# Altium PCB StrainNode.PcbDoc (part 1 of 2)
Units mm, origin at the board's own origin, x right, y up, seen from the top; angles counter-clockwise.
Board outline 65 x 65 mm, 4 copper layers (Top Layer 1, GND, 3V3, Bottom Layer 1), stack 0.408 mm thick; 79 components, 56 nets, 295 pads, 250 vias.
Unrouted connection lines stored in the file: 29.
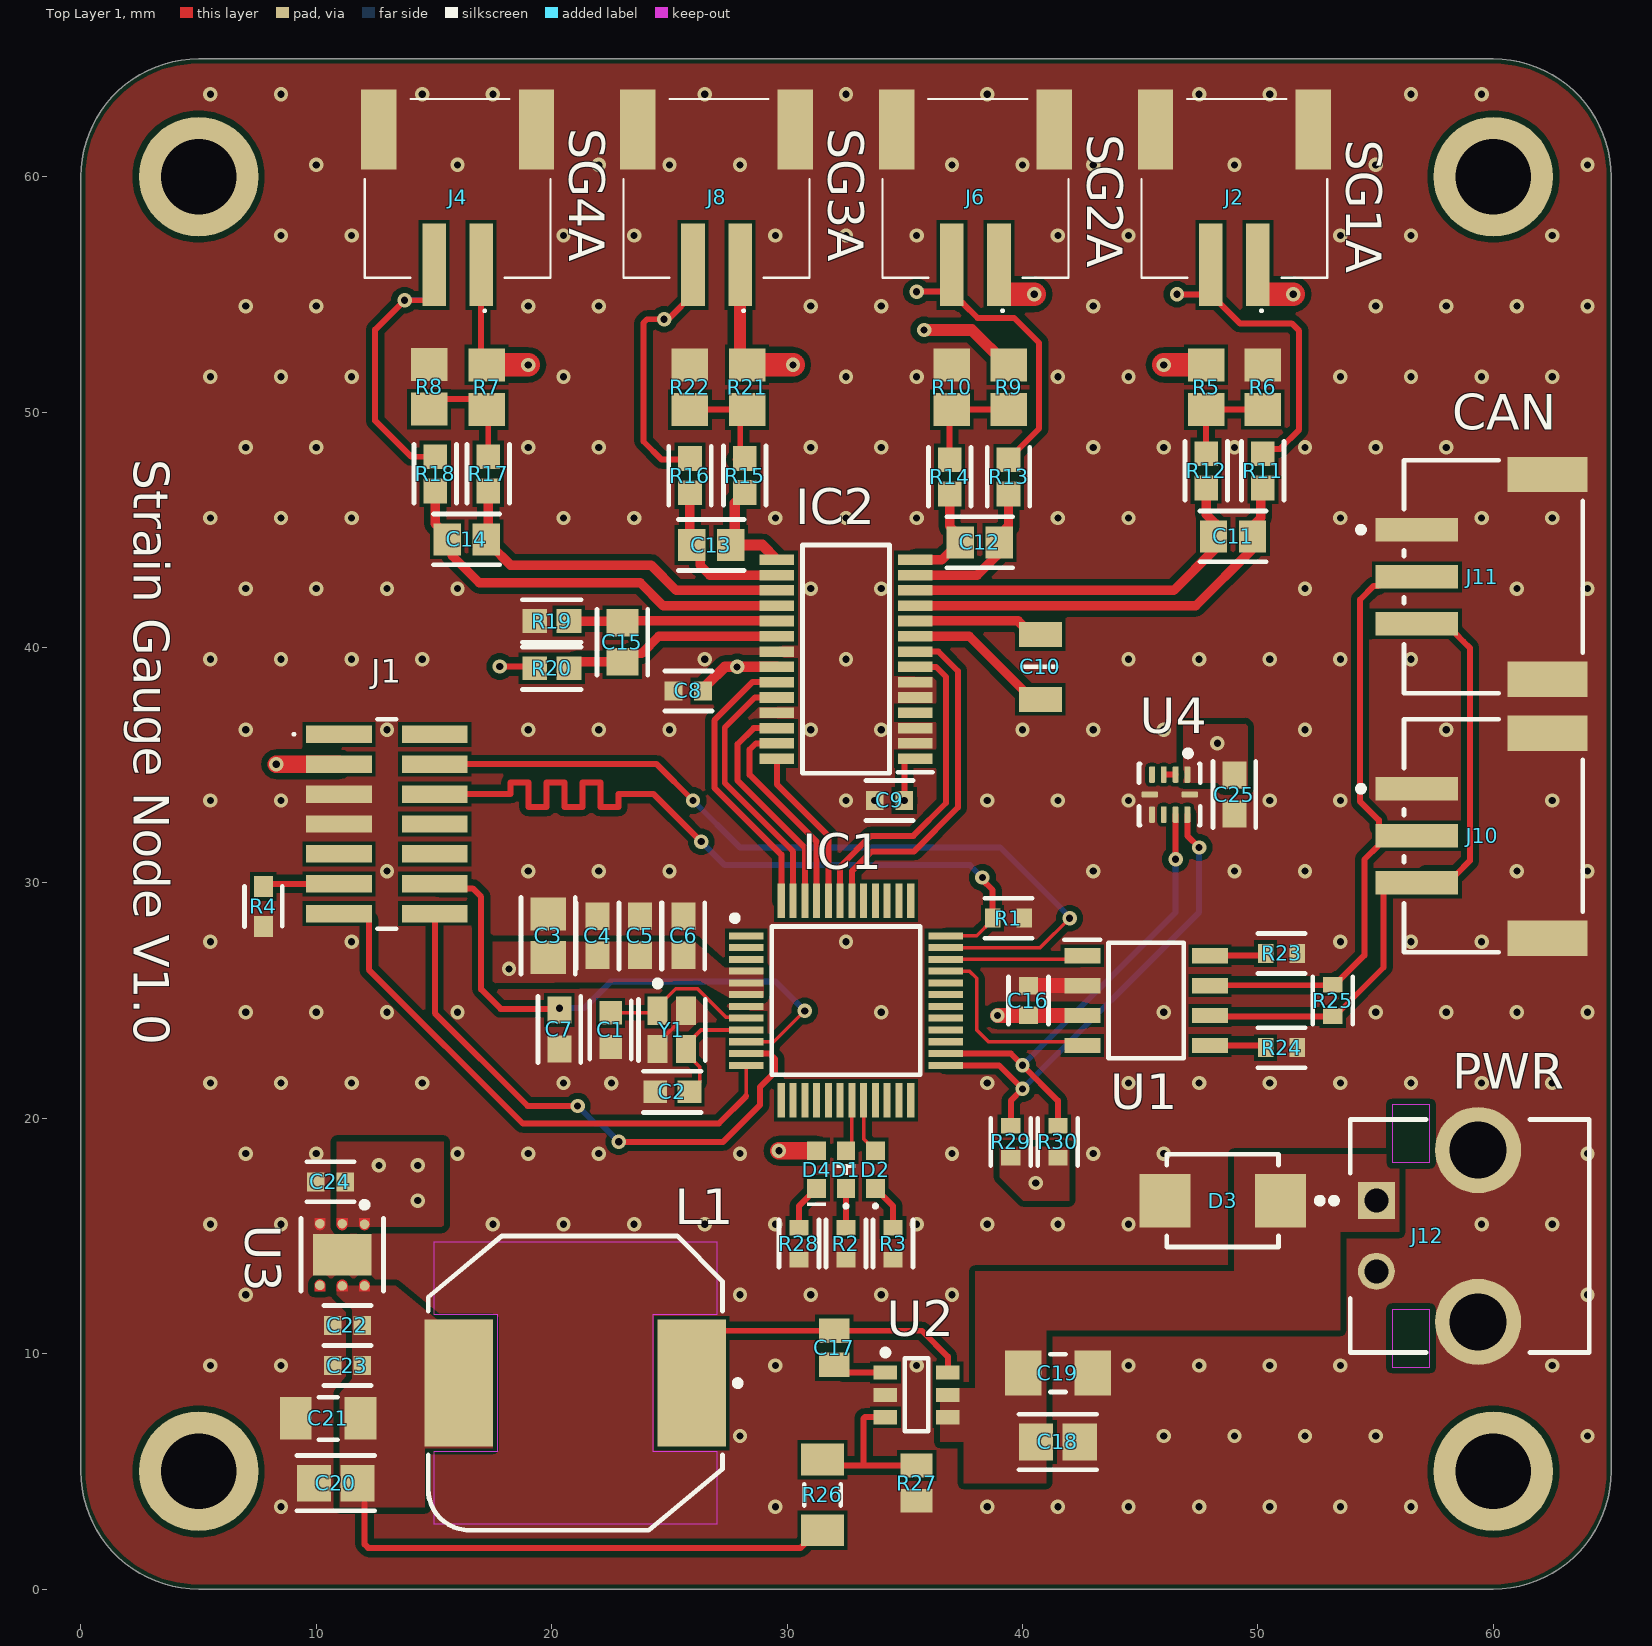
[diagram p0: Top Layer 1 view]
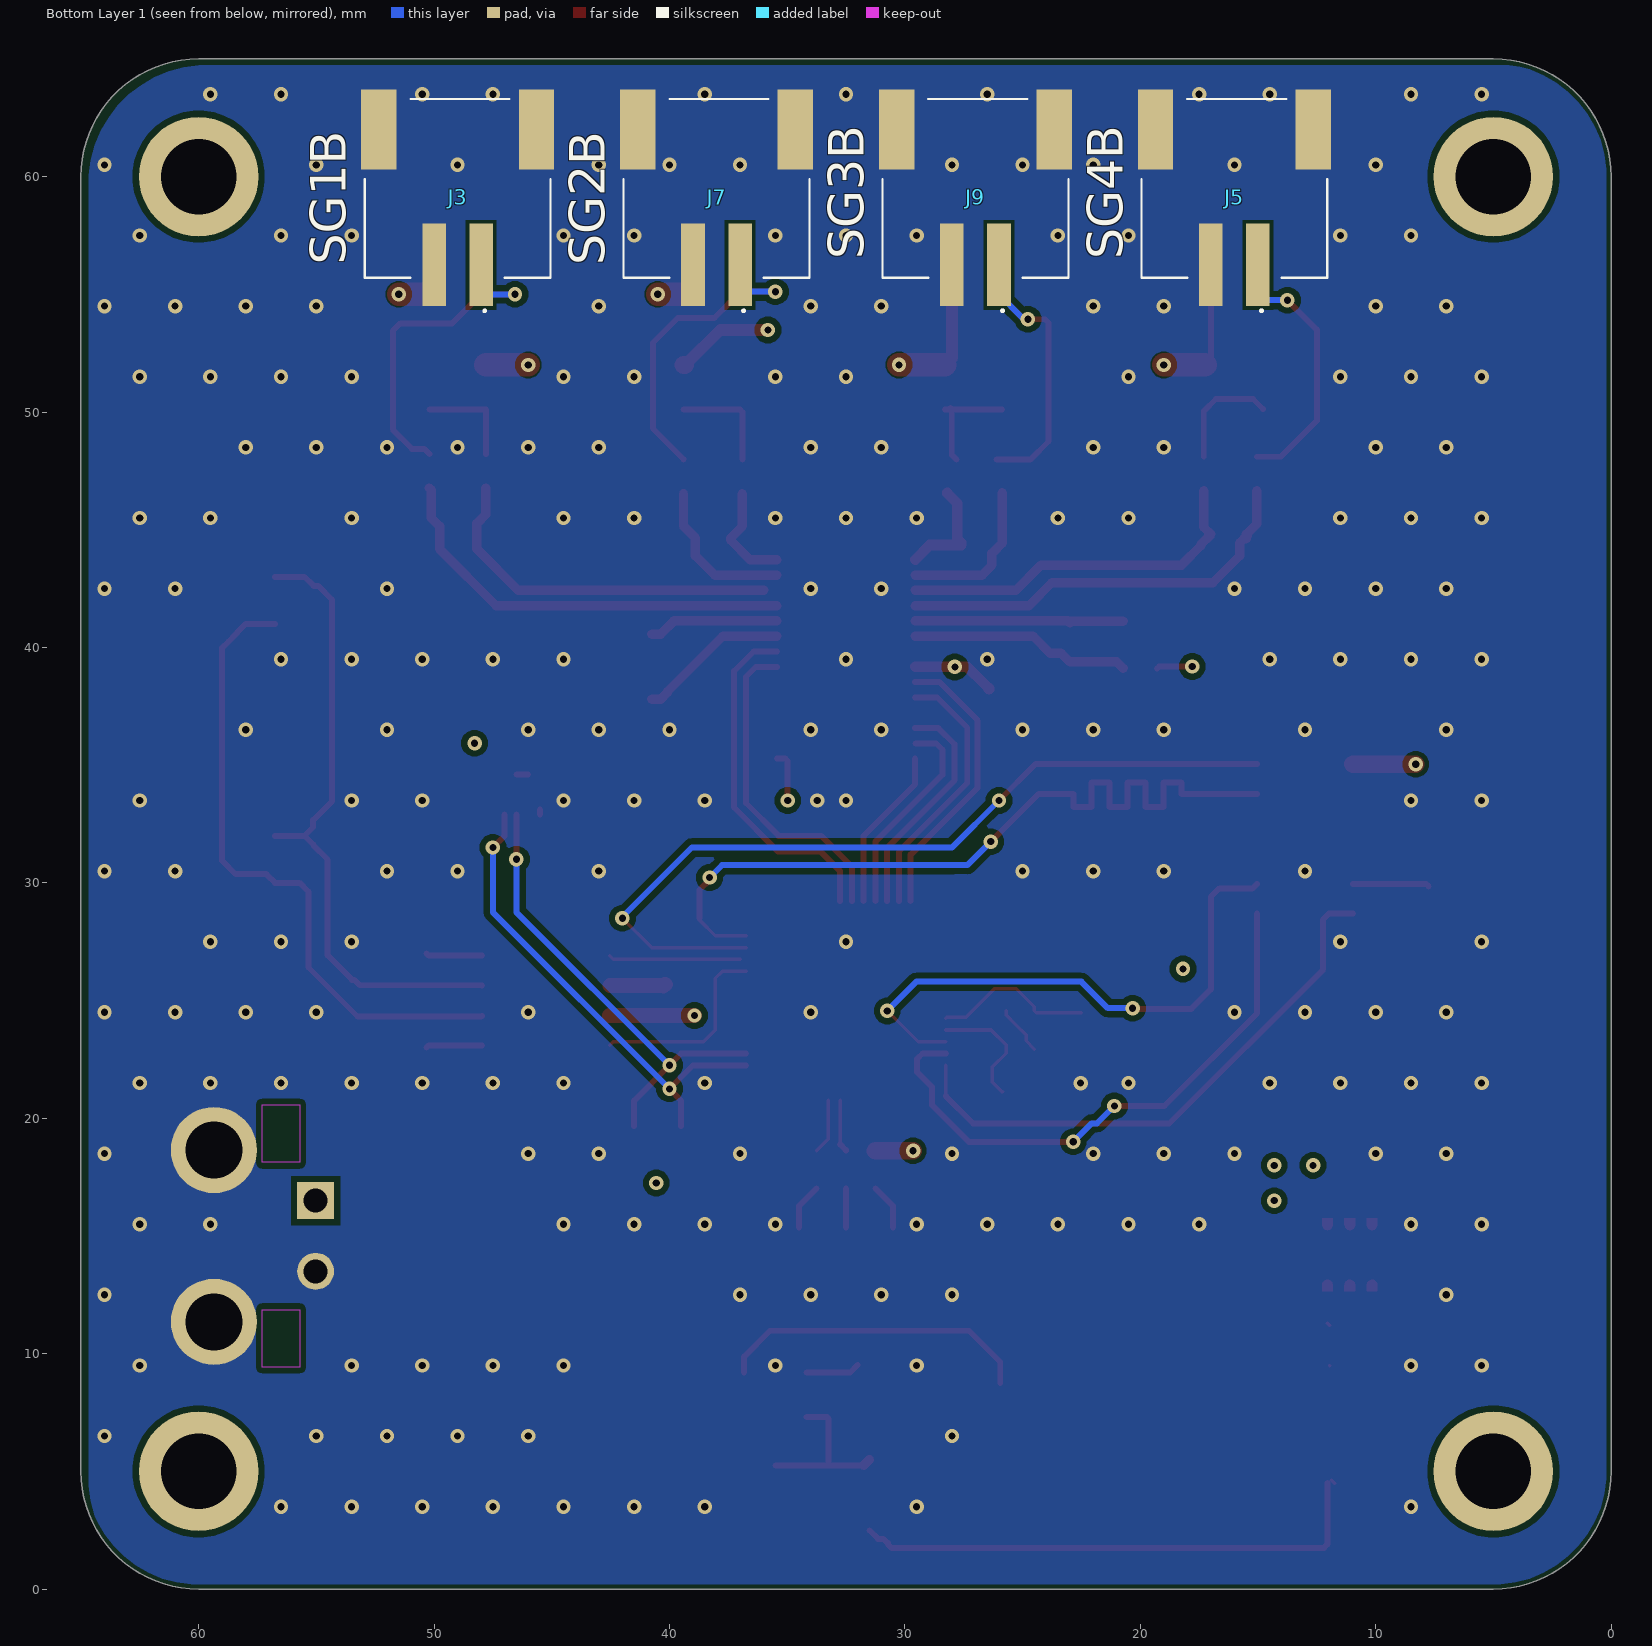
[diagram p1: Bottom Layer 1 view, seen from below]
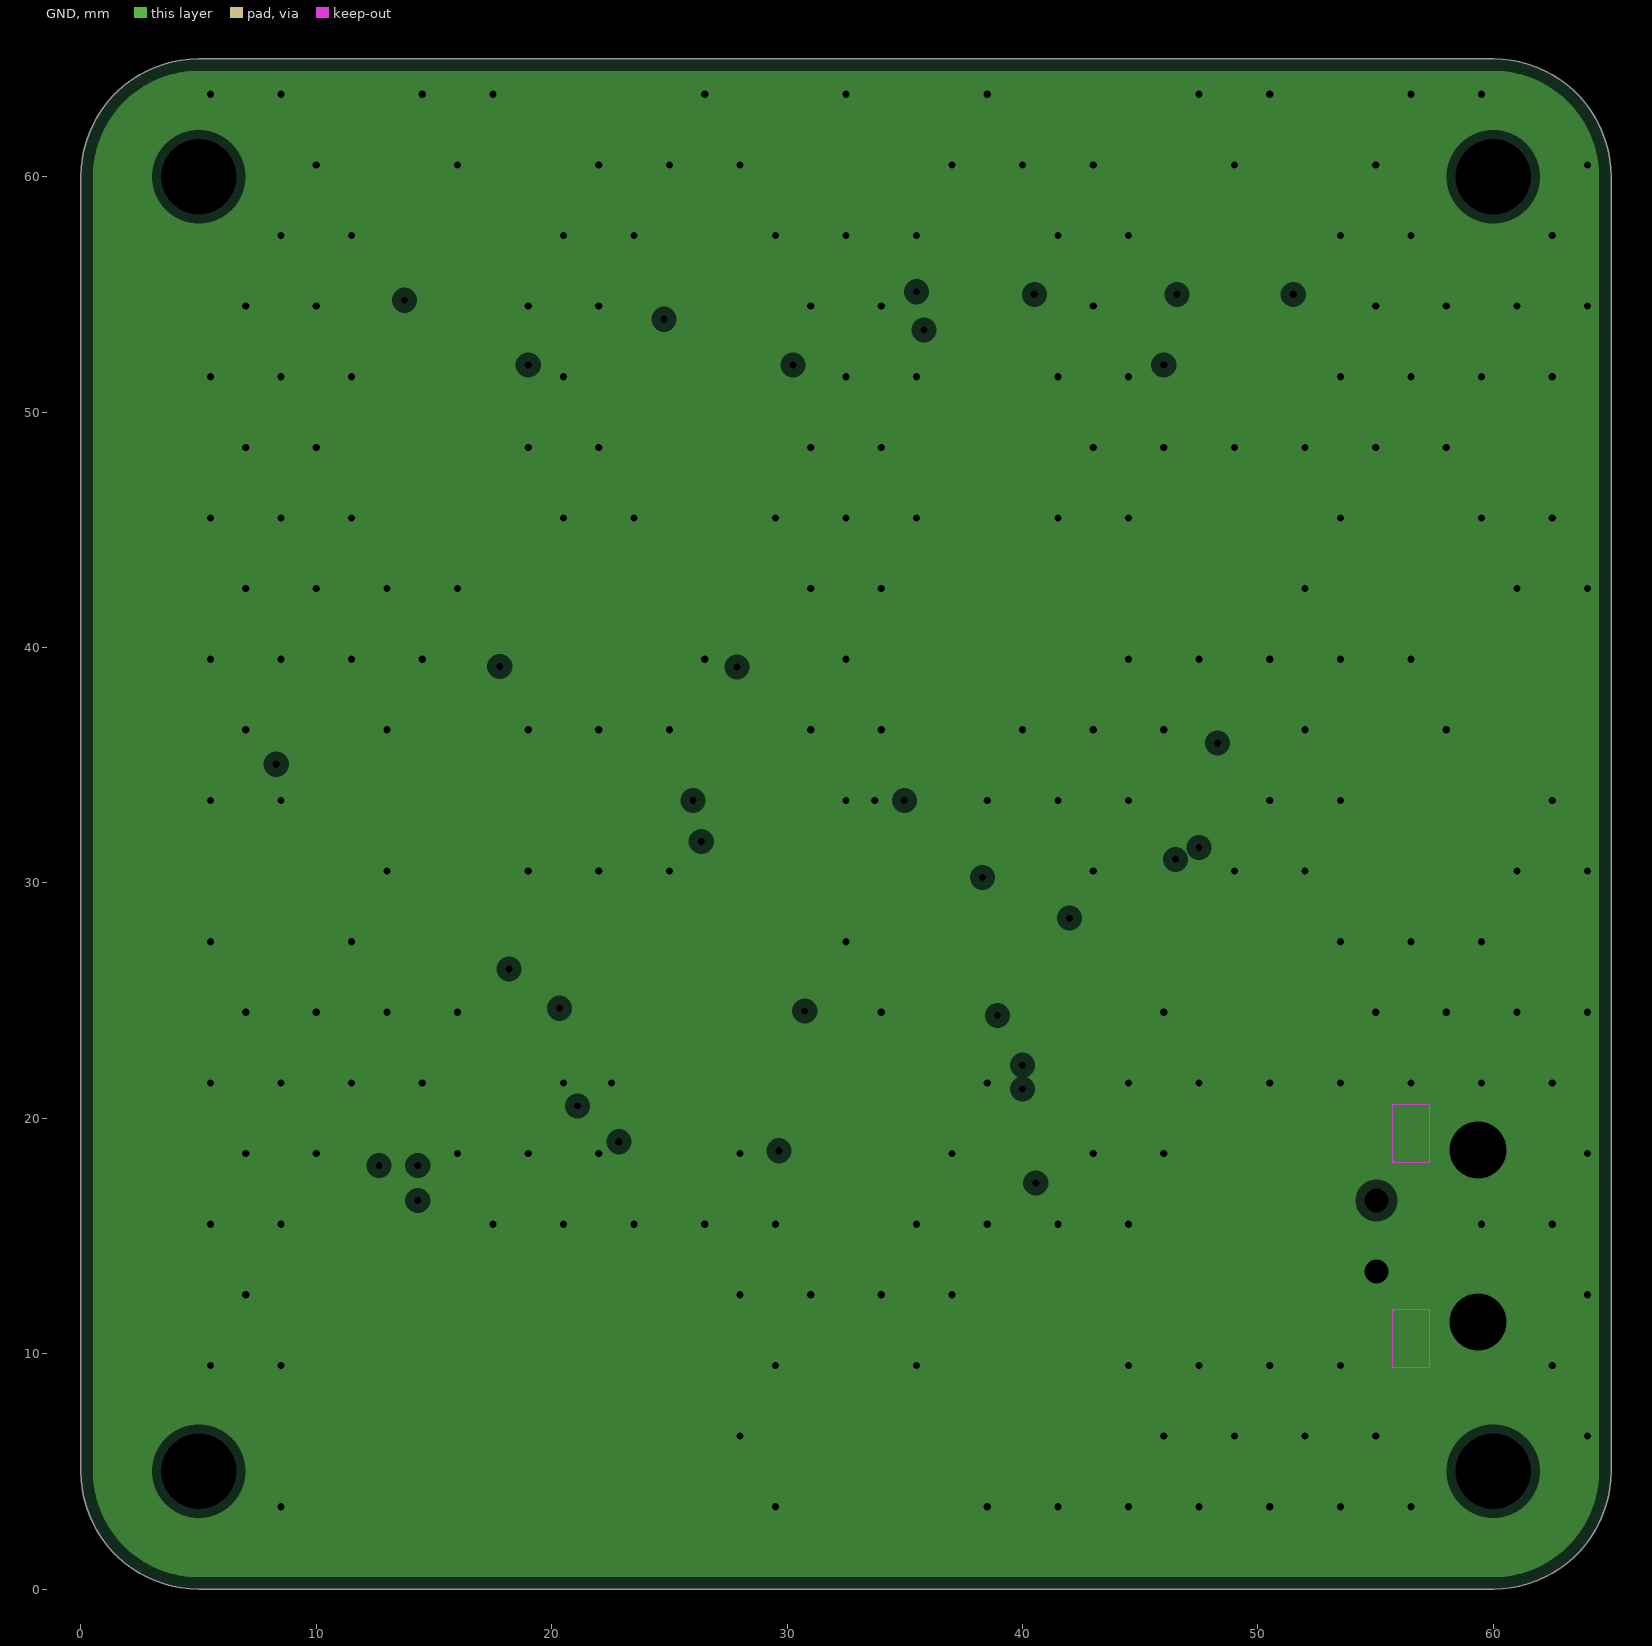
[diagram p2: GND, clearances drawn from the general rule]
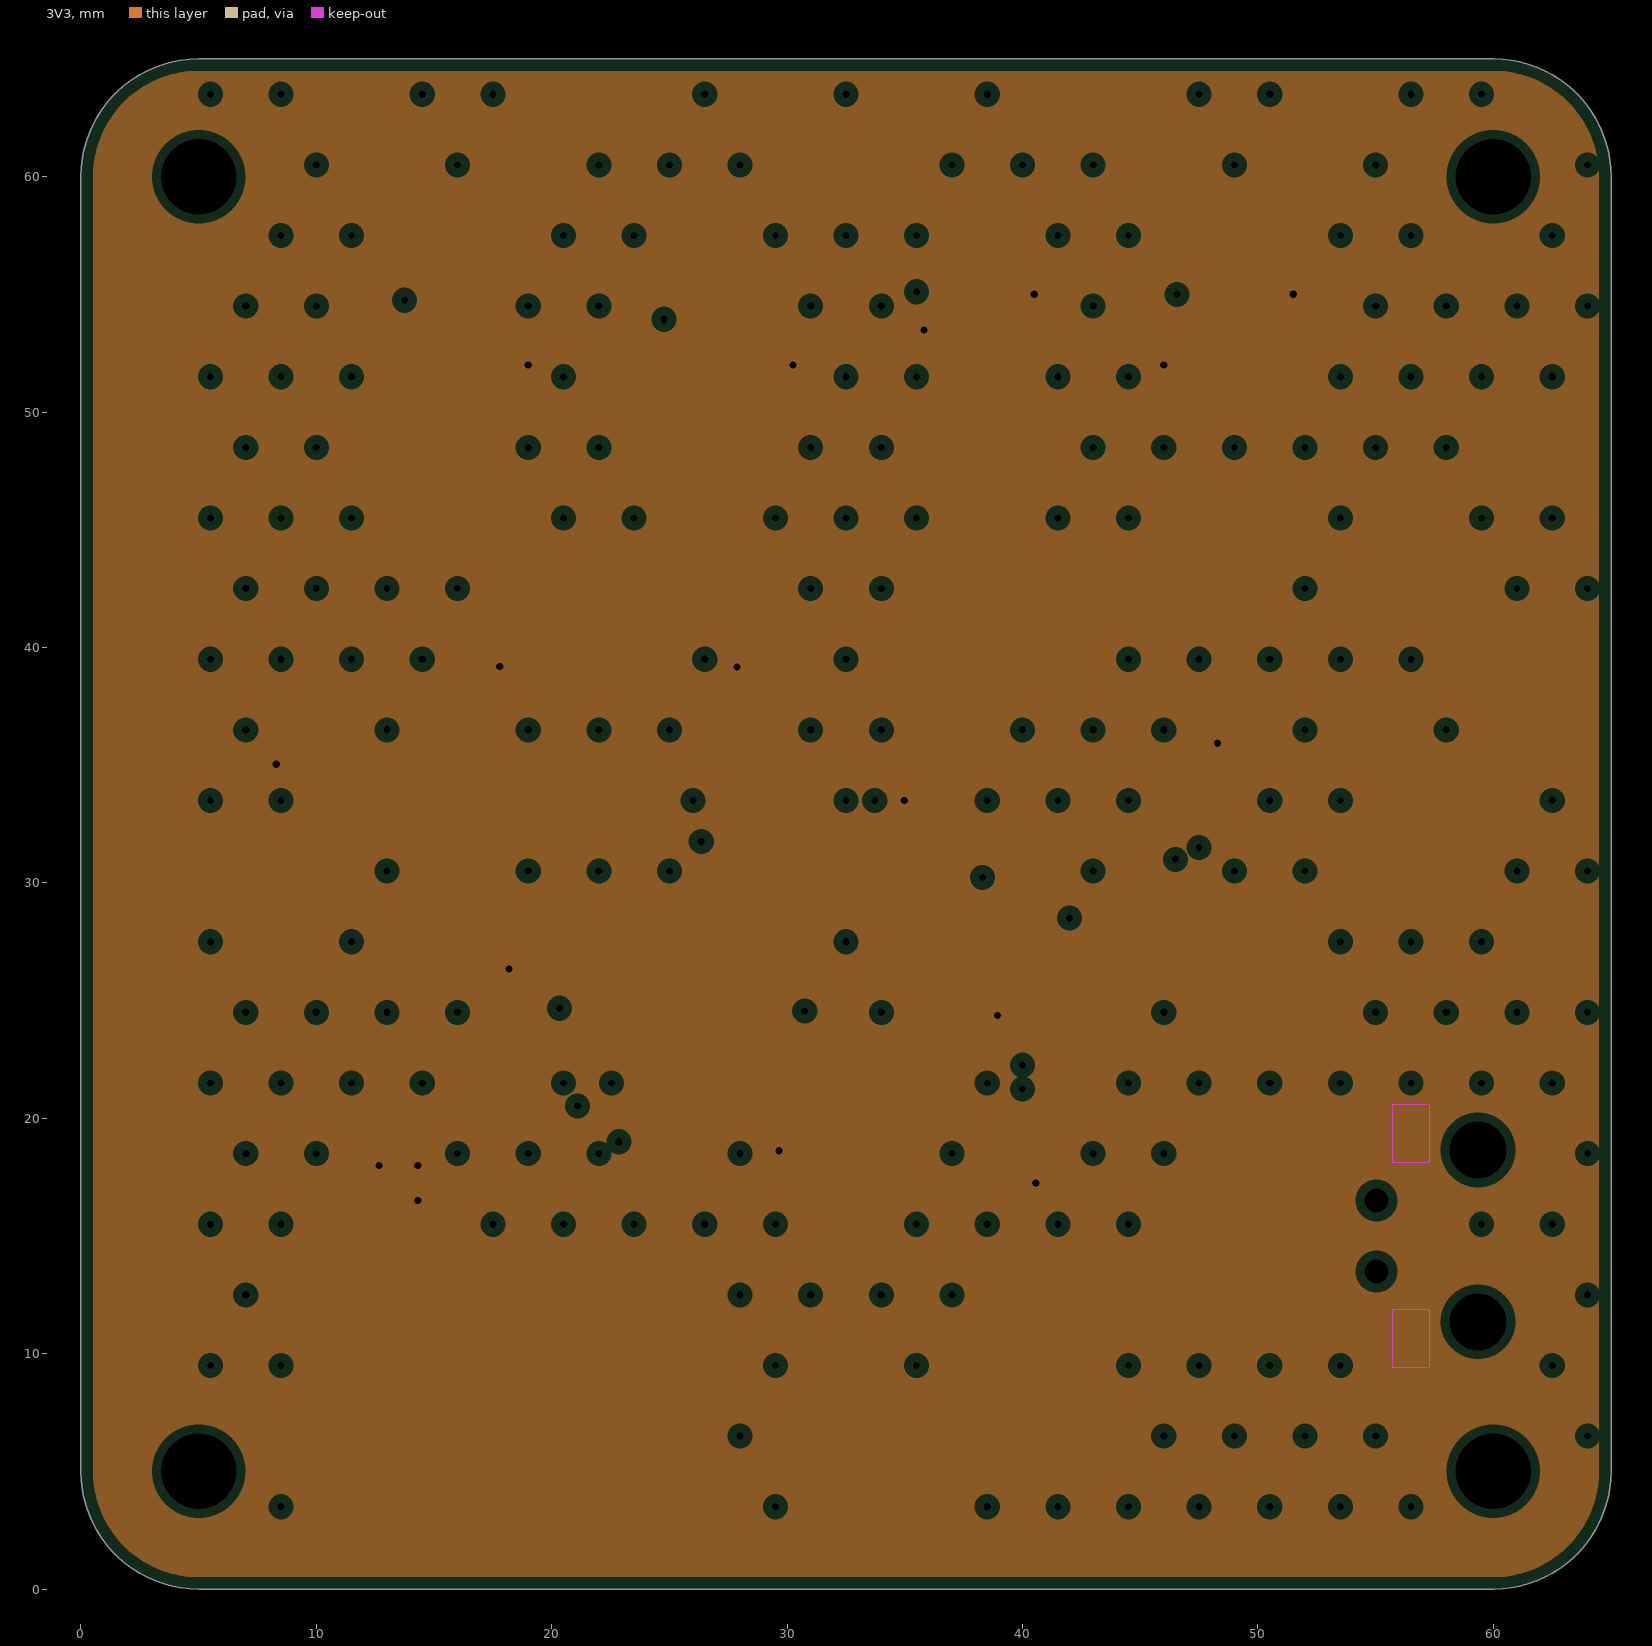
[diagram p3: 3V3, clearances drawn from the general rule]
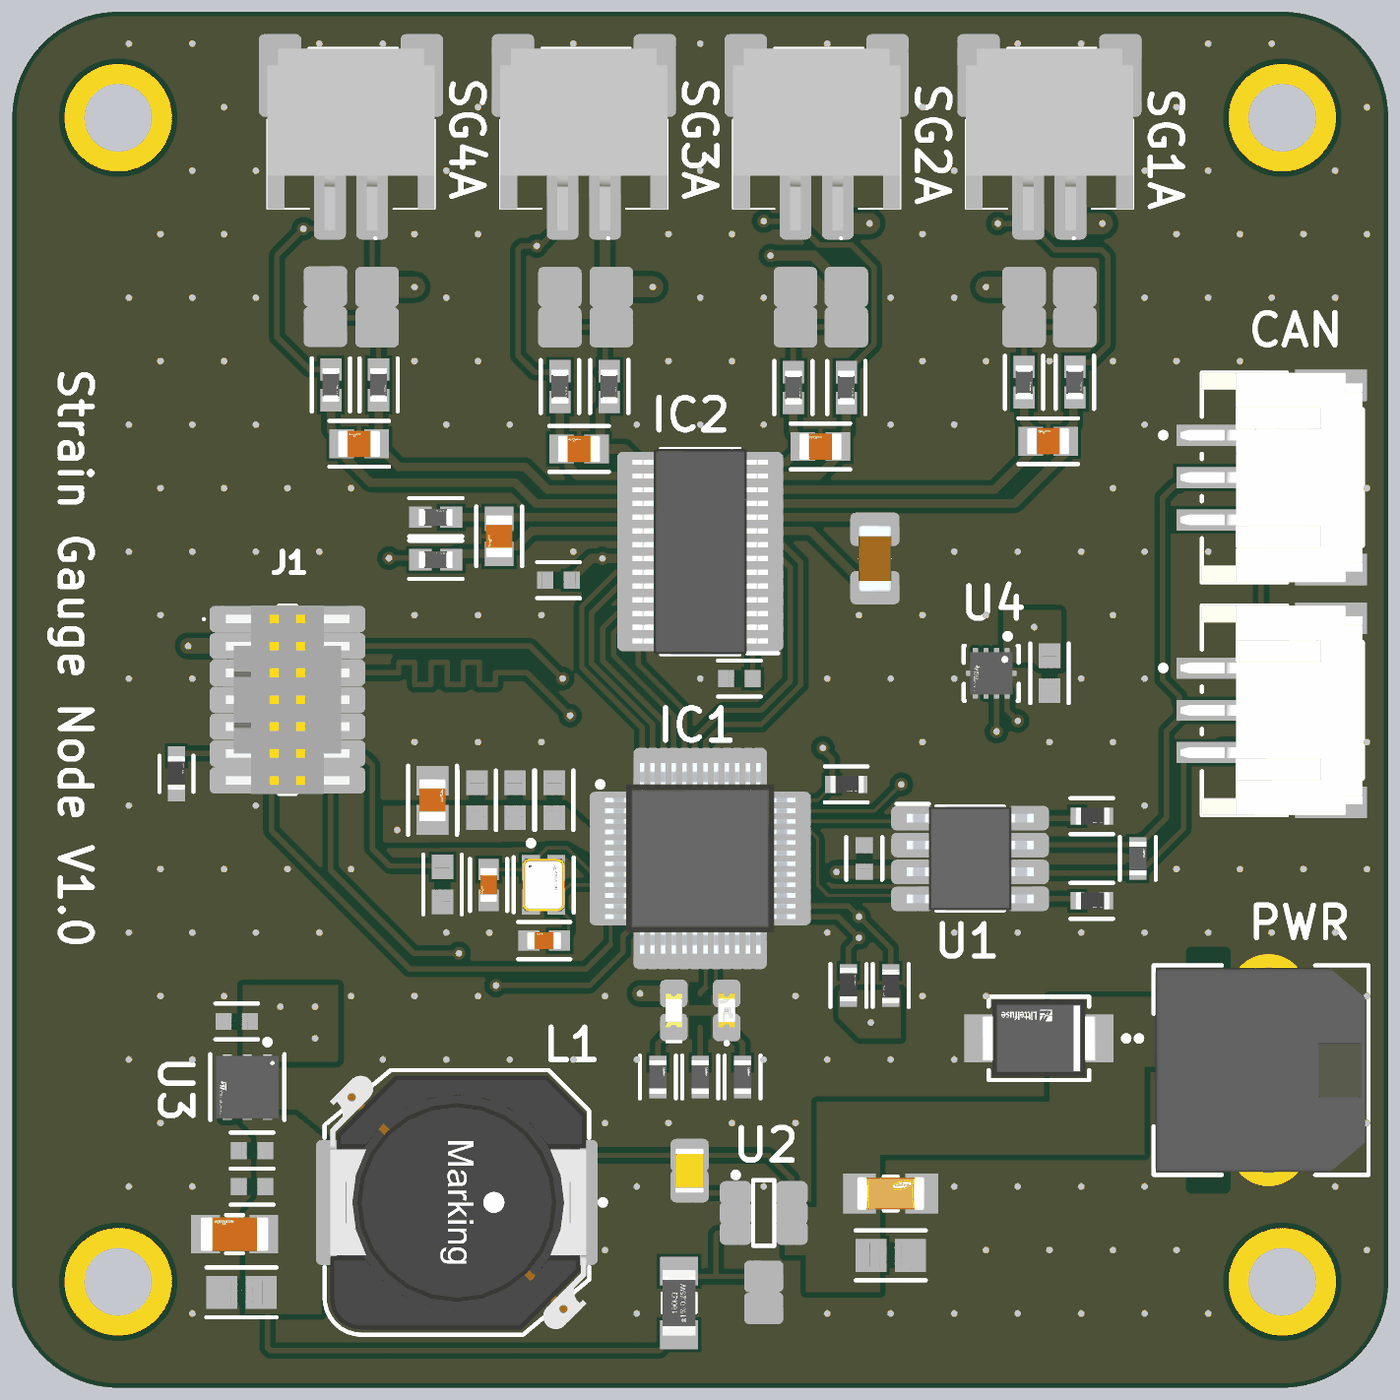
[diagram p4: 3D render of the assembled board from above, using the file's embedded part models]
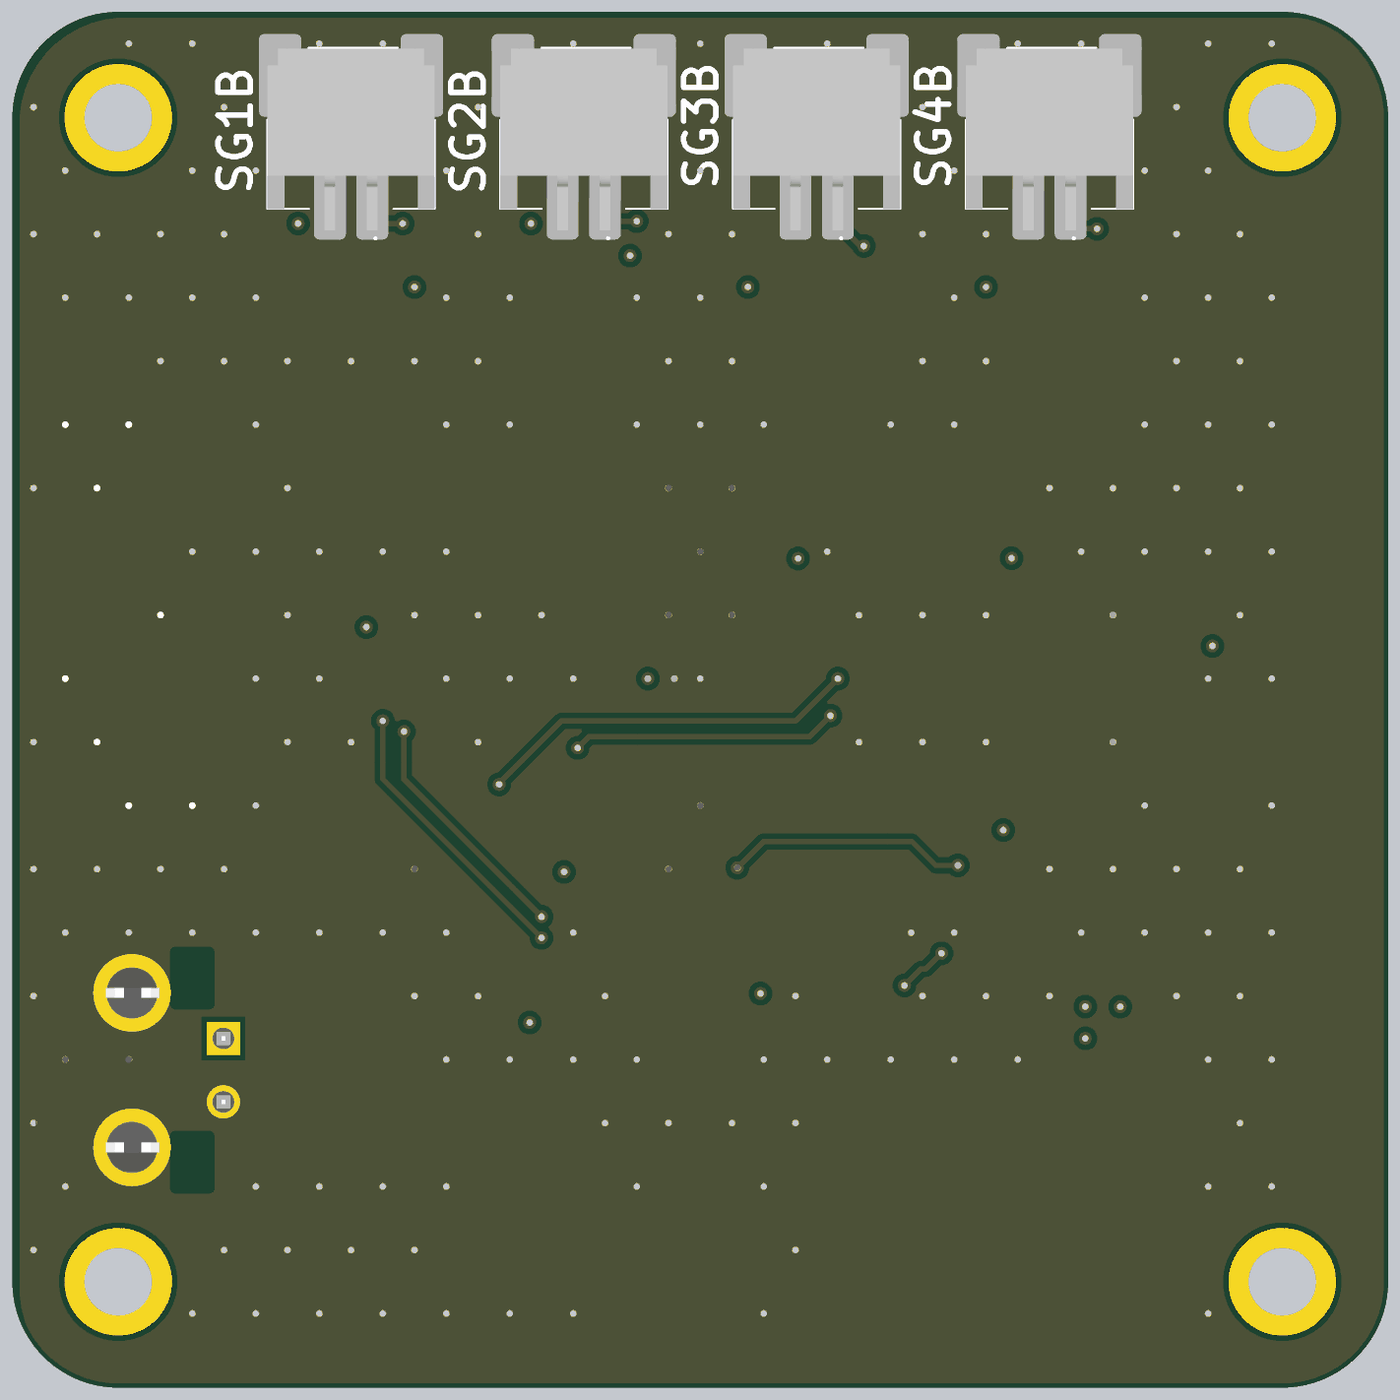
[diagram p5: 3D render of the assembled board from below, using the file's embedded part models]

## Layer stack, top to bottom
Top Solder: solder mask 0.0102, Solder Resist, Dk 3.5
Top Layer 1: signal copper 0.035
Dielectric 2: prepreg 0.0994, PP-006, Dk 4.1
GND: plane copper 0.0152, net GND
Dielectric 1: core 0.1088, FR-4, Dk 4.8
3V3: plane copper 0.0152, net 3V3
Dielectric 3: prepreg 0.0994, PP-006, Dk 4.1
Bottom Layer 1: signal copper 0.035
Bottom Solder: solder mask 0.0102, Solder Resist, Dk 3.5

## Board outline
0,5 ccw(c5,5) 5,0 60,0 ccw(c60,5) 65,5 65,60 ccw(c60,60) 60,65 5,65 ccw(c5,60) 0,60

## Design rules (kind name [scope] priority, off if disabled: settings)
BoardOutlineClearance [All] p1: gap=0.2 ignorepadtopadclearanceinfootprint=FALSE
Clearance "Stitching GND" [IsStitchingVia and InNet('GND') vs (IsVia and (Not IsStitchingVia)) Or IsPad] p1: gap=0.127 ignorepadtopadclearanceinfootprint=FALSE
Clearance [All] p2: gap=0.254 ignorepadtopadclearanceinfootprint=TRUE except(0.1: Arc-Arc Arc-Track Arc-SMDPad Track-Track Track-SMDPad; 0.15: Arc-Text Track-Text SMDPad-SMDPad SMDPad-Fill SMDPad-Poly SMDPad-Region SMDPad-Text THPad-Text Via-Text; 0.2: Arc-Via Track-Via; 0.35: Arc-THPad Track-THPad)
ComponentClearance ComponentClearance_1 [InComponent('L1','L2','L3','C24','C25','C26','C27') vs InComponent('L1','L2','L3','C24','C25','C26','C27')] p1 off: gap=0 collisioncheckmode=3 verticalgap=0 showdistances=FALSE
ComponentClearance [All] p2: gap=0 collisioncheckmode=3 verticalgap=0 showdistances=FALSE
DiffPairsRouting [All] p1: maxlimit=0.254 minlimit=0.254 mostfreqgap=0.254 toplayer_minwidth=0.254 toplayer_maxwidth=0.254 toplayer_prefwidth=0.254 bottomlayer_minwidth=0.254 bottomlayer_maxwidth=0.254 bottomlayer_prefwidth=0.254 maxuncoupledlength=12.7
HoleSize [All] p1: absolutevalues=TRUE maxlimit=7.62 minlimit=0.2 maxpercent=80.000 minpercent=20.000
MinimumAnnularRing [All] p1: minimumring=0.1
MinimumSolderMaskSliver [All] p1: minsoldermaskwidth=0.1
PasteMaskExpansion PasteMaskExpansion_1 [InPadClass('All Pads')] p1: expansion=0
PasteMaskExpansion [All] p2: expansion=0.254
PlaneClearance [All] p1: clearance=0.381
PlaneConnect [All] p1: pad.planeconnectstyle=Relief pad.reliefexpansion=0.508 pad.reliefentries=4 pad.reliefconductorwidth=0.254 pad.reliefairgap=0.254 via.planeconnectstyle=Direct via.reliefexpansion=0.508 via.reliefentries=4 via.reliefconductorwidth=0.254 via.reliefairgap=0.254
PolygonConnect [All] p1: connectstyle=Direct reliefconductorwidth=0.254 reliefentries=4 polygonreliefangle="90 Angle" airgapwidth=0.254
RoutingVias [All] p1: holewidth=0.305 width=0.61 viastyle="Through Hole" minholewidth=0.15 minwidth=0.25 maxholewidth=25.4 maxwidth=25.4
SMDNeckDown [All] p1 off: percent=100.000
SilkToSilkClearance [All] p1 off: silktosilkclearance=0.254
SilkToSolderMaskClearance SilkscreenOverComponentPads [IsPad] p1: minsilkscreentomaskgap=0.15 clearancetoexposedcopper=TRUE
SolderMaskExpansion [InPadClass('All Pads')] p1: expansion=0 istentingtop=FALSE useseparateexpansions=TRUE expansionbottom=0 istentingbottom=FALSE
SolderMaskExpansion SolderMaskExpansion_1 [All] p2: expansion=0.025 istentingtop=TRUE useseparateexpansions=TRUE expansionbottom=0.025 istentingbottom=TRUE
SupplyNets "Schematic Supply Nets_3" [InNet('3V3')] p1: voltage=0.000
SupplyNets "Schematic Supply Nets_2" [InNet('GND')] p2: voltage=0.000
SupplyNets "Schematic Supply Nets_1" [InNet('Vin')] p3: voltage=0.000
SupplyNets "Schematic Supply Nets" [InNet('5V0')] p4: voltage=0.000
UnRoutedNet [All] p1: checkbadconnections=TRUE
Width [All] p1: maxlimit=1.27 minlimit=0.127 preferedwidth=0.254
20 further rules are at their usual default settings.

## Classes and differential pairs
component class "Local PCB temperature sensor": C25 R29 R30 U4
component class "Power supply": C17 C18 C19 C20 C21 C22 C23 C24 D3 D4 J12 L1 R26 R27 R28 U2 U3
component class CAN_Tranceiver: C16 J10 J11 R23 R24 R25 U1
component class Toplevel: C1 C2 C3 C4 C5 C6 C7 D1 D2 IC1 J1 R1 R2 R3 R4 Y1
component class "Strain gauges": C8 C9 C10 C11 C12 C13 C14 C15 IC2 J2 J3 J4 J5 J6 J7 J8 J9 R5 R6 R7 R8 R9 R10 R11 R12 R13 R14 R15 R16 R17 R18 R19 R20 R21 R22 SG1-B

## Components (designator, comment, footprint, x,y, rotation, side; value= is the part's Value field where it differs from the comment)
C1 "4pF" FP-GQM187-0_15-IPC_B 22.5,23.75 r270 top
C2 "4pF" FP-GQM187-0_15-IPC_B 25.127,21.123 r180 top
C3 "4.7uF" FP-GCM21B-0_15-IPC_A 19.85,27.75 r90 top
C4 "100nF" FP-CL10-IPC_A 21.95,27.75 r90 top
C5 "100nF" FP-CL10-IPC_A 23.75,27.75 r90 top
C6 "100nF" FP-CL10-IPC_A 25.6,27.75 r90 top
C7 "100nF" FP-CL10-IPC_A 20.325,23.774 r270 top
C8 "100nF" FP-CL10-IPC_C 25.804,38.15 r180 top
C9 "100nF" FP-CL10-IPC_C 34.35,33.5 r180 top
C10 "100nF" CAPC3216X180N 40.755,39.175 r270 top
C11 "GRM2195C1H103JA01D" FP-GRM219-0_1-IPC_B 48.941,44.716 r180 top
C12 "GRM2195C1H103JA01D" FP-GRM219-0_1-IPC_B 38.181,44.466 r180 top
C13 "GRM2195C1H103JA01D" FP-GRM219-0_1-IPC_B 26.774,44.35 r180 top
C14 "GRM2195C1H103JA01D" FP-GRM219-0_1-IPC_B 16.386,44.591 r180 top
C15 "GRM2195C1H103JA01D" FP-GRM219-0_1-IPC_B 23,40.222 r270 top
C16 "1uF" FP-CL10-IPC_C 40.25,25 r90 top
C17 "Capacitor 100 nF +/-10% 50 V 0805" CAPC2013X95X50LL10T25 32,10.25 r270 top value=100nF
C18 "CL21B474KBFNNNF" FP-CL21-IPC_A 41.5,6.25 r0 top value=470nF
C19 "CL31B106KBHNNNE" FP-CL31B106KBHNNNE-IPC_A 41.5,9.172 r0 top value=10µF
C20 "CL21B474KBFNNNF" FP-CL21-IPC_A 10.824,4.5 r180 top value=470nF
C21 "GRM31CR61A476KE15K" FP-GRM31C-0_2-e0_3_0_8-IPC_B 10.5,7.25 r180 top value=47µF
C22 "100nF" FP-CL10-IPC_C 11.324,11.2 r180 top
C23 "10uF" FP-CL10-IPC_C 11.324,9.494 r180 top
C24 "10uF" FP-CL10-IPC_C 10.6,17.3 r180 top
C25 "100nF" FP-CL10-IPC_A 49,33.75 r270 top
D1 "150060GS55040" WL-SMCD_0603 -1237.5,1287.82 r90 top
D2 "150060YS75020" WL-SMCW_0603_150060xx75020 33.75,17.82 r90 top
D3 "SMBJ33A" FP-SMBJ-MFG 48.5,16.5 r180 top
D4 "150060RS75000" WL-SMCW_0603_150060xx75000 31.25,17.82 r90 top
IC1 "STM32G0B1CBT6" QFP50P900X900X160-48N 32.5,25 r0 top locked
IC2 "ADS1234IPWR" SOP65P640X120-28N 32.5,39.5 r180 top locked
J1 "FTSH-107-01-L-DV-K-TR" FTSH10701LDVKTR 13,32.5 r270 top
J2 "S2B-PH-SM4-TB_LF__SN_" S2BPHSM4TBLFSN 49,59.5 r0 top locked
J3 "S2B-PH-SM4-TB_LF__SN_" S2BPHSM4TBLFSN 49,59.5 r180 bottom locked
J4 "S2B-PH-SM4-TB_LF__SN_" S2BPHSM4TBLFSN 16,59.5 r0 top locked
J5 "S2B-PH-SM4-TB_LF__SN_" S2BPHSM4TBLFSN 16,59.5 r180 bottom
J6 "S2B-PH-SM4-TB_LF__SN_" S2BPHSM4TBLFSN 38,59.5 r0 top locked
J7 "S2B-PH-SM4-TB_LF__SN_" S2BPHSM4TBLFSN 38,59.5 r180 bottom
J8 "S2B-PH-SM4-TB_LF__SN_" S2BPHSM4TBLFSN 27,59.5 r0 top locked
J9 "S2B-PH-SM4-TB_LF__SN_" S2BPHSM4TBLFSN 27,59.5 r180 bottom
J10 "S3B-PH-SM4-TB(LF)(SN)" FP-S3B-PH-SM4-TB_LF_SN-MFG 60,32 r270 top locked
J11 "S3B-PH-SM4-TB(LF)(SN)" FP-S3B-PH-SM4-TB_LF_SN-MFG 60,43 r270 top locked
J12 "43650-0205" FP-43650-0205-MFG 59,15 r90 top
L1 "7447706330" WE-PD_1260P 21,8.75 r270 top value=33uH
R1 "10k" FP-RT0603-IPC_C 39.4,28.5 r0 top value=10KΩ
R2 "220 0603" FP-AF0603-IPC_C 32.5,14.677 r90 top
R3 "220 0603" FP-AF0603-IPC_C 34.5,14.677 r90 top
R4 "100" FP-RT0603-MFG 7.75,29 r90 top value=100Ω
R5 "120" RESC2013X60X40ML20T25 47.8,51.05 r90 top
R6 "120" RESC2013X60X40ML20T25 50.2,51.05 r270 top
R7 "120" RESC2013X60X40ML20T25 17.234,51.05 r90 top
R8 "120" RESC2013X60X40ML20T25 14.789,51.076 r270 top
R9 "120" RESC2013X60X40ML20T25 39.403,51.05 r90 top
R10 "120" RESC2013X60X40ML20T25 37,51.05 r270 top
R11 "100" FP-ERA3A-IPC_B 50.2,47.5 r270 top
R12 "100" FP-ERA3A-IPC_B 47.8,47.5 r270 top
R13 "100" FP-ERA3A-IPC_B 39.403,47.25 r270 top
R14 "100" FP-ERA3A-IPC_B 36.903,47.25 r270 top
R15 "100" FP-ERA3A-IPC_B 28.202,47.301 r270 top
R16 "100" FP-ERA3A-IPC_B 25.871,47.297 r270 top
R17 "100" FP-ERA3A-IPC_B 17.303,47.376 r270 top
R18 "100" FP-ERA3A-IPC_B 15.05,47.376 r270 top
R19 "100" FP-ERA3A-IPC_B 20.005,41.121 r0 top
R20 "100" FP-ERA3A-IPC_B 20.005,39.115 r0 top
R21 "120" RESC2013X60X40ML20T25 28.299,51.054 r90 top
R22 "120" RESC2013X60X40ML20T25 25.866,51.05 r270 top
R23 "10k" FP-RT0603-IPC_C 51,27 r0 top value=10KΩ
R24 "10k" FP-RT0603-IPC_C 51,23 r0 top value=10KΩ
R25 "120" FP-AF0603-IPC_C 53.175,25 r90 top
R26 "CRGCQ1206F100K" FP-CRGCQ1206-IPC_A 31.5,4 r90 top value=100k
R27 "ERA-6AEB1872V" RESC2013X60X40LL20T25 35.5,4.5 r270 top value=18.7k
R28 "220 0603" FP-AF0603-IPC_C 30.5,14.677 r90 top
R29 "10k" FP-RT0603-IPC_C 39.5,19 r90 top value=10KΩ
R30 "10k" FP-RT0603-IPC_C 41.5,19 r270 top value=10KΩ
U1 "TCAN3414DR" SOIC127P600X175-8N 45.25,25 r0 top locked
U2 "LMR51610XDBVR" SOT95P280X145-6N 35.5,8.25 r0 top
U3 "LD39200PU33R" FP-DFN6-7946637-MFG 11.1,14.2 r270 top
U4 "TMP461AIRUNR-S" FP-RUN0010A-MFG 46.25,33.75 r270 top
Y1 "ABM10W-50.0000MHZ-4-B1U-T3" FP-ABM10W-MFG 25.099,23.75 r270 top

## Footprints (in the part's own frame and the unit in brackets; to place one, negate y for a bottom-side part, rotate by r counter-clockwise, add the part's x,y. Pads: shape width x height; smd on the part's side, far side on the other; paste and mask are expansions set on the pad)
CAPC2013X95X50LL10T25 [mm] "Chip Capacitor, 2-Leads, Body 2.10x1.35mm, IPC High Density"
  rect 1.05x1.3 smd: 1(-0.725,0) 2(0.725,0)
  body extent -1.05,-0.67 1.05,0.67, height 0.95
CAPC3216X180N [mm]
  rect 1.07x1.82 smd: 1(-1.38,0) 2(1.38,0)
  silkscreen extent 0,-0.7 0,0.7, body extent -1.6,-0.8 1.6,0.8, height 1.8
FP-43650-0205-MFG [mm]
  rect 1.57x1.57 hole 1.02 paste-2539.97 mask+0: 1(1.5,3.97)
  round 1.57 hole 1.02 paste-2539.97 mask+0: 2(-1.5,3.97)
  round 3.66 hole 2.41 paste-2539.97 mask+0: 3(-3.65,-0.35) 4(3.65,-0.35)
  Keep-Out Layer region: -5.575,1.7 -3.125,1.7 -3.125,3.3 -5.575,3.3
  Keep-Out Layer region: 3.125,1.7 5.575,1.7 5.575,3.3 3.125,3.3
  silkscreen extent -4.95,-5.08 4.95,5.89, body extent -5.58,-5.18 5.58,5.18, height 0.25
FP-ABM10W-MFG [mm]
  rect 1.2x0.85 smd paste+0 mask+0: 1(-0.812,-0.6) 2(0.812,-0.6) 3(0.812,0.6) 4(-0.812,0.6)
  silkscreen extent -2.1,-1.41 1.3,1.42, body extent -1.51,-1.15 1.51,1.15, height 0.25
FP-AF0603-IPC_C [mm]
  rect 0.659x0.812 smd paste+0 mask+0: 1(-0.677,0) 2(0.677,0)
  silkscreen extent -1.01,-0.85 1.01,0.85, body extent -1.11,-0.55 1.11,0.55, height 0.25
FP-CL10-IPC_A [mm]
  rect 1.158x1.012 smd paste+0 mask+0: 1(-0.827,0) 2(0.827,0)
  silkscreen extent -1.41,-0.91 1.41,0.91, body extent -1.91,-1.01 1.91,1.01, height 0.25
FP-CL10-IPC_C [mm]
  rect 0.758x0.812 smd paste+0 mask+0: 1(-0.627,0) 2(0.627,0)
  silkscreen extent -1.01,-0.85 1.01,0.85, body extent -1.11,-0.55 1.11,0.55, height 0.25
FP-CL21-IPC_A [mm]
  rect 1.455x1.556 smd paste+0 mask+0: 1(-0.926,0) 2(0.926,0)
  silkscreen extent -1.65,-1.18 1.65,1.18, body extent -2.15,-1.28 2.15,1.28, height 0.25
FP-CL31B106KBHNNNE-IPC_A [mm]
  rect 1.554x1.906 smd paste+0 mask+0: 1(-1.476,0) 2(1.476,0)
  silkscreen extent -0.32,-0.8 0.32,0.8, body extent -2.75,-1.45 2.75,1.45, height 0.25
FP-CRGCQ1206-IPC_A [mm]
  rect 1.356x1.81 smd paste+0 mask+0: 1(-1.501,0) 2(1.501,0)
  silkscreen extent -0.45,-0.77 0.45,0.78, body extent -2.68,-1.4 2.68,1.4, height 0.25
FP-DFN6-7946637-MFG [mm]
  round 0.405 smd paste+0 mask+0: 1(-1.3,0.95) 2(-1.321,0) 3(-1.321,-0.95) 4(1.3,-0.95) 5(1.321,0) 6(1.321,0.95)
  rect 1.75x2.5 smd paste+0 mask+0: 7(0,0)
  Top Layer 1 region: -1.55,0.225 -1.275,0.225 -1.189,0.208 -1.116,0.159 -1.067,0.086 -1.05,0 -1.05,0 -1.067,-0.086 -1.116,-0.159 -1.189,-0.208 -1.275,-0.225 -1.275,-0.225 -1.55,-0.225
  Top Layer 1 region: -1.55,1.175 -1.275,1.175 -1.189,1.158 -1.116,1.109 -1.067,1.036 -1.05,0.95 -1.05,0.95 -1.067,0.864 -1.116,0.791 -1.189,0.742 -1.275,0.725 -1.275,0.725 -1.55,0.725
  Top Layer 1 region: -1.55,-0.725 -1.275,-0.725 -1.189,-0.742 -1.116,-0.791 -1.067,-0.864 -1.05,-0.95 -1.05,-0.95 -1.067,-1.036 -1.116,-1.109 -1.189,-1.158 -1.275,-1.175 -1.275,-1.175 -1.55,-1.175
  Top Layer 1 region: 1.55,0.725 1.275,0.725 1.189,0.742 1.116,0.791 1.067,0.864 1.05,0.95 1.05,0.95 1.067,1.036 1.116,1.109 1.189,1.158 1.275,1.175 1.275,1.175 1.55,1.175
  Top Layer 1 region: 1.55,-0.225 1.275,-0.225 1.189,-0.208 1.116,-0.159 1.067,-0.086 1.05,0 1.05,0 1.067,0.086 1.116,0.159 1.189,0.208 1.275,0.225 1.275,0.225 1.55,0.225
  Top Layer 1 region: 1.55,-1.175 1.275,-1.175 1.189,-1.158 1.116,-1.109 1.067,-1.036 1.05,-0.95 1.05,-0.95 1.067,-0.864 1.116,-0.791 1.189,-0.742 1.275,-0.725 1.275,-0.725 1.55,-0.725
  silkscreen extent -2.25,-1.75 1.55,1.75, body extent -1.65,-1.65 1.65,1.65, height 0.25
FP-ERA3A-IPC_B [mm]
  rect 1.055x1.006 smd paste+0 mask+0: 1(-0.726,0) 2(0.726,0)
  silkscreen extent -1.25,-0.9 1.25,0.9, body extent -1.5,-0.75 1.5,0.75, height 0.25
FP-GCM21B-0_15-IPC_A [mm]
  rect 1.406x1.508 smd paste+0 mask+0: 1(-0.926,0) 2(0.926,0)
  silkscreen extent -1.63,-1.15 1.63,1.15, body extent -2.13,-1.25 2.13,1.25, height 0.25
FP-GQM187-0_15-IPC_B [mm]
  rect 1.007x0.958 smd paste+0 mask+0: 1(-0.726,0) 2(0.726,0)
  silkscreen extent -1.23,-0.88 1.23,0.88, body extent -1.48,-0.73 1.48,0.73, height 0.25
FP-GRM31C-0_2-e0_3_0_8-IPC_B [mm]
  rect 1.355x1.806 smd paste+0 mask+0: 1(-1.376,0) 2(1.376,0)
  silkscreen extent -0.4,-0.9 0.4,0.9, body extent -2.3,-1.15 2.3,1.15, height 0.25
FP-GRM219-0_1-IPC_B [mm]
  rect 1.158x1.362 smd paste+0 mask+0: 1(-0.827,0) 2(0.827,0)
  silkscreen extent -1.41,-1.08 1.41,1.08, body extent -1.66,-0.93 1.66,0.93, height 0.25
FP-RT0603-IPC_C [mm]
  rect 0.659x0.812 smd paste+0 mask+0: 1(-0.677,0) 2(0.677,0)
  silkscreen extent -1.01,-0.85 1.01,0.85, body extent -1.11,-0.55 1.11,0.55, height 0.25
FP-RT0603-MFG [mm]
  rect 0.9x0.8 smd paste+0 mask+0: 1(-0.85,0) 2(0.85,0)
  silkscreen extent -0.85,-0.81 0.86,0.8, body extent -1.4,-0.55 1.4,0.55, height 0.25
FP-RUN0010A-MFG [mm]
  rrect40% 0.7x0.25 smd paste+0 mask+0: 1(-0.85,0.75) 2(-0.85,0.25) 3(-0.85,-0.25) 4(-0.85,-0.75) 6(0.85,-0.75) 7(0.85,-0.25) 8(0.85,0.25) 9(0.85,0.75)
  rrect40% 0.25x0.7 smd paste+0 mask+0: 5(0,-0.85) 10(0,0.85)
  silkscreen extent -1.87,-1.3 1.3,1.3, body extent -1.3,-1.3 1.3,1.3, height 0.25
FP-S3B-PH-SM4-TB_LF_SN-MFG [mm]
  rect 1x3.5 smd paste+0 mask+0: 1(-2,-3.25) 2(0,-3.25) 3(2,-3.25)
  rect 1.5x3.4 smd paste+0 mask+0: 4(-4.35,2.3) 5(4.35,2.3)
  silkscreen extent -4.95,-5.75 4.95,3.8, body extent -5.2,-5.1 5.2,4.1, height 0.25
FP-SMBJ-MFG [mm]
  rect 2.16x2.26 smd paste+0 mask+0: 1(-2.45,0) 2(2.45,0)
  silkscreen extent -4.25,-1.97 2.38,1.97, body extent -3.63,-2.07 3.63,2.07, height 0.25
FTSH10701LDVKTR [mm]
  rect 0.74x2.79 smd: 1(-3.81,-2.035) 2(-3.81,2.035) 3(-2.54,-2.035) 4(-2.54,2.035) 5(-1.27,-2.035) 6(-1.27,2.035) 7(0,-2.035) 8(0,2.035) 9(1.27,-2.035) 10(1.27,2.035) 11(2.54,-2.035) 12(2.54,2.035) 13(3.81,-2.035) 14(3.81,2.035)
  silkscreen extent -4.44,-4 4.45,0.4, body extent -4.45,-2.92 4.45,2.92, height 6.12
QFP50P900X900X160-48N [mm]
  rect 1.475x0.3 smd: 1(-4.238,2.75) 2(-4.238,2.25) 3(-4.238,1.75) 4(-4.238,1.25) 5(-4.238,0.75) 6(-4.238,0.25) 7(-4.238,-0.25) 8(-4.238,-0.75) 9(-4.238,-1.25) 10(-4.238,-1.75) 11(-4.238,-2.25) 12(-4.238,-2.75) 25(4.238,-2.75) 26(4.238,-2.25) 27(4.238,-1.75) 28(4.238,-1.25) 29(4.238,-0.75) 30(4.238,-0.25) 31(4.238,0.25) 32(4.238,0.75) 33(4.238,1.25) 34(4.238,1.75) 35(4.238,2.25) 36(4.238,2.75)
  rect 0.3x1.475 smd: 13(-2.75,-4.238) 14(-2.25,-4.238) 15(-1.75,-4.238) 16(-1.25,-4.238) 17(-0.75,-4.238) 18(-0.25,-4.238) 19(0.25,-4.238) 20(0.75,-4.238) 21(1.25,-4.238) 22(1.75,-4.238) 23(2.25,-4.238) 24(2.75,-4.238) 37(2.75,4.238) 38(2.25,4.238) 39(1.75,4.238) 40(1.25,4.238) 41(0.75,4.238) 42(0.25,4.238) 43(-0.25,4.238) 44(-0.75,4.238) 45(-1.25,4.238) 46(-1.75,4.238) 47(-2.25,4.238) 48(-2.75,4.238)
  silkscreen extent -4.85,-3.15 3.15,3.62, body extent -4.5,-4.5 4.5,4.5, height 1.6
RESC2013X60X40LL20T25 [mm] "Chip Resistor, 2-Leads, Body 2.00x1.25mm, IPC High Density"
  rect 1x1.35 smd: 1(-0.75,0) 2(0.75,0)
  body extent -1.1,-0.72 1.1,0.72, height 0.6
RESC2013X60X40ML20T25 [mm] "Chip Resistor, 2-Leads, Body 2.00x1.25mm, IPC Low Density"
  rect 1.4x1.55 smd: 1(-0.95,0) 2(0.95,0)
  body extent -1.1,-0.72 1.1,0.72, height 0.6
S2BPHSM4TBLFSN [mm]
  rect 1x3.5 smd: 1(1,-3.25) 2(-1,-3.25)
  rect 1.5x3.4 smd: MP1(3.35,2.5) MP2(-3.35,2.5)
  silkscreen extent -3.95,-5.25 3.95,3.8, body extent -3.95,-4.83 3.95,3.77, height 5.6
SOIC127P600X175-8N [mm]
  rect 1.525x0.65 smd: 1(-2.712,1.905) 2(-2.712,0.635) 3(-2.712,-0.635) 4(-2.712,-1.905) 5(2.712,-1.905) 6(2.712,-0.635) 7(2.712,0.635) 8(2.712,1.905)
  silkscreen extent -3.47,-2.45 1.6,2.58, body extent -3,-2.45 3,2.45, height 1.75
SOP65P640X120-28N [mm]
  rect 1.475x0.45 smd: 1(-2.938,4.225) 2(-2.938,3.575) 3(-2.938,2.925) 4(-2.938,2.275) 5(-2.938,1.625) 6(-2.938,0.975) 7(-2.938,0.325) 8(-2.938,-0.325) 9(-2.938,-0.975) 10(-2.938,-1.625) 11(-2.938,-2.275) 12(-2.938,-2.925) 13(-2.938,-3.575) 14(-2.938,-4.225) 15(2.938,-4.225) 16(2.938,-3.575) 17(2.938,-2.925) 18(2.938,-2.275) 19(2.938,-1.625) 20(2.938,-0.975) 21(2.938,-0.325) 22(2.938,0.325) 23(2.938,0.975) 24(2.938,1.625) 25(2.938,2.275) 26(2.938,2.925) 27(2.938,3.575) 28(2.938,4.225)
  silkscreen extent -3.67,-4.85 1.85,4.85, body extent -3.2,-4.85 3.2,4.85, height 1.13
SOT95P280X145-6N [mm] "SOT23, 6-Leads, Body 2,90x2,80mm, Pitch 0,95mm, IPC Medium Density"
  rect 1x0.6 smd: 1(-1.325,0.95) 2(-1.325,0) 3(-1.325,-0.95) 4(1.325,-0.95) 5(1.325,0) 6(1.325,0.95)
  silkscreen extent -1.45,-1.55 0.5,1.92, body extent -0.88,-1.52 0.87,1.53, height 1.45
WE-PD_1260P [mm] "SMT Shielded Power Inductor, 2-leads, body 12x12mm"
  rect 5.4x2.9 smd: 1(0,4.95) 2(0,-4.95)
  Top Layer 1 keep-out region: -6,6 -2.9,6 -2.9,3.3 2.9,3.3 2.9,6 6,6 6,-6 2.9,-6 2.9,-3.3 -2.9,-3.3 -2.9,-6 -6,-6
  silkscreen extent -6.25,-6.25 6.25,7.03, body extent -5.99,-6.01 6.01,6.14, height 5.75
WL-SMCD_0603 [mm] "SMD Mono-color Chip LED, body 1.6x0.8mm"
  rect 0.8x0.75 smd: 1(-1270.8,-1270) 2(-1269.2,-1270)
  silkscreen extent -1271.62,-1270.4 -1269.78,-1269.6, body extent -1270.8,-1270.4 -1269.2,-1269.6, height 0.42
WL-SMCW_0603_150060xx75000 [mm] "SMD Mono-color Chip LED, body 1.60 x 0.80 mm"
  rect 0.8x0.8 smd: 1(-0.8,0) 2(0.8,0)
  silkscreen extent -1.55,-0.4 -1.4,0.4, body extent -0.8,-0.4 0.8,0.4, height 0.7
WL-SMCW_0603_150060xx75020 [mm] "SMD Mono-color Chip LED, body 1.6x0.8mm"
  rect 0.8x0.8 smd: 1(-0.8,0) 2(0.8,0)
  silkscreen extent -1.62,-0.08 -1.48,0.07, body extent -0.8,-0.4 0.8,0.4, height 0.25

## Part data
C1 C2: library part CMP-06035-061124-1, "GQM1875C2E4R0BB12D / Ceramic Capacitor 4pF ±0.1pF 250VDC C0G 0603 Paper T/R", Case Code (Imperial)=0603, Case Code (Metric)=1608, Dielectric=C0G, Max Operating Temperature=125°C, Min Operating Temperature=-55°C, Package Quantity=4000, Voltage Rating=250V, Capacitance=4pF, Case/Package=0603, Construction=Flat, Depth=0.8mm, Height=0.7mm, Length=1.6mm, Mount="Surface Mount", Packaging="Tape and Reel", Radiation Hardening=No, Series=GQM, Termination=SMD/SMT, Thickness=0.031inch, Voltage Rating (DC)=250V, Width=0.8mm
C3: library part CMP-2007-03343-2, "Ceramic Capacitor for Automotive 4.7uF ±10% 16VDC X7R 0805 Embossed T/R", Case Code (Imperial)=0805, Case Code (Metric)=2012, Dielectric=X7R, Max Operating Temperature=125°C, Min Operating Temperature=-55°C, Package Quantity=1, Ratings=AEC-Q200, Tolerance=10%, Voltage=16V, Capacitance=4.7uF, Case/Package=0805, Depth=1.25mm, Height=1.25mm, Lead Free="Lead Free", Length=2mm, Mount="Surface Mount", Packaging="Tape and Reel", Radiation Hardening=No, REACH SVHC="No SVHC", Termination=SMD/SMT, Thickness=0.055inch, Voltage Rating=16V, Voltage Rating (DC)=16V, Weight=0.000335oz, Width=0.049inch
C4 C5 C6 C7 C25: library part CMP-13271-002683-1, "Cap Ceramic 100nF 16V X7R ±10% Pad SMD 0603 +125°C T/R", Case Code (Imperial)=0603, Case Code (Metric)=1608, Max Operating Temperature=125°C, Min Operating Temperature=-55°C, Ratings=AEC-Q200, Tolerance=10%, Voltage Rating=16V, Capacitance=100nF, Case/Package=0603, Features="Soft Termination", Length=0.063inch, Mount="Surface Mount", Packaging="Tape and Reel", Thickness=0.035inch, Width=0.031inch
C8 C9 C22: library part CMP-13271-002683-1, "Cap Ceramic 100nF 16V X7R ±10% Pad SMD 0603 +125°C T/R / CL10B104KO8WPNC", Case Code (Imperial)=0603, Case Code (Metric)=1608, Max Operating Temperature=125°C, Min Operating Temperature=-55°C, Ratings=AEC-Q200, Tolerance=10%, Voltage Rating=16V, Capacitance=100nF, Case/Package=0603, Features="Soft Termination", Length=0.063inch, Mount="Surface Mount", Packaging="Tape and Reel", Thickness=0.035inch, Width=0.031inch
C10: library part GRM31C5C1E104JA01L, "Capacitor", Manufacturer_Name="Murata Electronics", Mouser Part Number=81-GRM31C5C1E104JA01, Arrow Part Number=GRM31C5C1E104JA01L, Arrow Price/Stock=https://www.arrow.com/en/products/grm31c5c1e104ja01l/murata-manufacturing?region=nac, Datasheet Link=https://search.murata.co.jp/Ceramy/image/img/A01X/G101/ENG/GRM31C5C1E104JA01-01A.pdf, Height=1.8mm, Manufacturer_Part_Number=GRM31C5C1E104JA01L, Mouser Price/Stock=https://www.mouser.co.uk/ProductDetail/Murata-Electronics/GRM31C5C1E104JA01L?qs=Iy3qAC6%2FTQjjy5bmw5NuQw%3D%3D, Supplier 1=Avnet, Supplier Part Number 1=GRM31C5C1E104JA01L
C11 C12 C13 C14 C15: library part CMP-2007-00135-2, "Chip Multilayer Ceramic Capacitors for General Purpose, 0805, 10000pF, C0G, 30ppm/°C, 5%, 50V", Capacitance=10nF, Case Code (Imperial)=0805, Case Code (Metric)=2012, Dielectric=C0G, Dielectric Material=Ceramic, Insulation Resistance=10GR, Max Operating Temperature=125°C, Min Operating Temperature=-55°C, Package Quantity=1, Temperature Coefficient=30ppm/°C, Tolerance=5%, Voltage=50V, Case/Package=0805, Depth=1.25mm, Height=0.85mm, Lead Free="Lead Free", Length=2mm, Material=Ceramic, Mount="Surface Mount", Number of Pins=2, Packaging="Tape and Reel", Radiation Hardening=No, REACH SVHC="No SVHC", Termination=SMD/SMT, Thickness=0.037inch, Voltage Rating=50V, Voltage Rating (DC)=50V, Width=0.049inch
C16: library part CMP-13271-000784-1, "Cap Ceramic 1uF 16V X7R ±10% Pad SMD 0603 +125°C T/R / CL10B105KO8NNNL", Case/Package=0603, Dielectric=X7R, Max Operating Temperature=125°C, Min Operating Temperature=-55°C, Package Quantity=15000, Tolerance=10%, Voltage Rating=16V, Capacitance=1uF, Depth=0.8mm, Height=0.8mm, Lead Free="Lead Free", Length=1.6mm, Mount="Surface Mount", Packaging="Tape and Reel", Radiation Hardening=No, Thickness=0.035inch, Voltage Rating (DC)=16V, Width=0.031inch
C17: library part CMP-001-00018-6, "Chip Capacitor, 100 nF, +/- 10%, 50 V, 0805 (2012 Metric)", Capacitor Type=Ceramic, Case/Package=0805, Max Operating Temperature=125°C, Min Operating Temperature=-55°C, Tolerance=10%, Voltage Rating=50V, Mounting Technology=SM, Pins=2, RoHS Compliant=True
C18 C20: library part CMP-001-00098-1, "Ceramic Capacitor, Multilayer, Ceramic, 50V, 10% +Tol, 10% -Tol, X7R, 15% TC, 0.47uF, Surface Mount, 0805", Capacitor Type=Ceramic, Case/Package=0805, Max Operating Temperature=125°C, Min Operating Temperature=-55°C, Package Shape=Rectangular, Package Style=SMTMeter, Rated DC Voltage (URdc)=50V, Temperature Characteristics Code=X7R, Tolerance  (fill in as +-)=10%, Dielectric Material=Ceramic, Height=1.25mm, JESD-609 Code=e3, Length=2mm, Mounting Technology="Surface Mount", Multilayer=Yes, Packaging="Tape and Reel", Pins=2, Reach SVHC Compliant=Yes, RoHS Compliant=Yes, Terminal Finish=Nickel, Termination=Wraparound, Tolerance (fill in as +-)=10%, Width=1.25mm
C19: library part CMP-001-00099-1, "Ceramic Capacitor, Multilayer, Ceramic, 50V, 10% +Tol, 10% -Tol, X7R, 15% TC, 10uF, Surface Mount, 1206", Capacitor Type=Ceramic, Case/Package=1206, Max Operating Temperature=125°C, Min Operating Temperature=-55°C, Package Shape=Rectangular, Package Style=SMTMeter, Rated DC Voltage (URdc)=50V, Temperature Characteristics Code=X7R, Tolerance  (fill in as +-)=10%, Dielectric Material=Ceramic, Height=1.8mm, JESD-609 Code=e3, Length=3.2mm, Mounting Technology="Surface Mount", Multilayer=Yes, Packaging="Tape and Reel", Pins=2, Reach SVHC Compliant=Yes, RoHS Compliant=Yes, Terminal Finish=Nickel, Termination=Wraparound, Tolerance (fill in as +-)=10%, Width=1.6mm
C21: library part CMP-001-00103-1, "Ceramic Capacitor, Multilayer, Ceramic, 10V, 10% +Tol, 10% -Tol, X5R, 15% TC, 47uF, Surface Mount, 1206", Capacitor Type=Ceramic, Case/Package=1206, Max Operating Temperature=85°C, Min Operating Temperature=-55°C, Package Shape=Rectangular, Package Style=SMTMeter, Rated DC Voltage (URdc)=10V, Temperature Characteristics Code=X5R, Tolerance  (fill in as +-)=10%, Dielectric Material=Ceramic, Height=1.6mm, JESD-609 Code=e3, Length=3.2mm, Mounting Technology="Surface Mount", Multilayer=Yes, Packaging="Tape and Reel", Pins=2, Reach SVHC Compliant=Yes, RoHS Compliant=Yes, Terminal Finish=Nickel, Termination=Wraparound, Tolerance (fill in as +-)=10%, Width=1.6mm
C23 C24: library part CMP-13271-003287-1, "Cap Ceramic 10uF 16V X6S ±20% Pad SMD 0603 +105°C T/R / CL10X106MO8NRNC", Case Code (Imperial)=0603, Case Code (Metric)=1608, Max Operating Temperature=105°C, Min Operating Temperature=-55°C, Tolerance=20%, Voltage Rating=16V, Capacitance=10uF, Case/Package=0603, Length=0.063inch, Mount="Surface Mount", Packaging="Tape and Reel", Thickness=0.035inch, Width=0.031inch
D1: library part CMP-03913-90235563-2, "150060GS55040 WL-SMCD SMT Mono-color Chip LED Diffused", Forward Current=60mA, Forward Voltage=3.2V, Max Operating Temperature=85°C, Max Reverse Voltage (DC)=5V, Min Operating Temperature=-40°C, Dominant Wavelength=525nm, Height=400µm, Length=1.6mm, Luminous Intensity=430mcd, NexarPartId=90235563, Packaging="Tape and Reel", Peak Wavelength=520nm, RoHS=Compliant, Viewing Angle=140°, Wavelength=525nm, Width=800µm
D2: library part CMP-03913-104891429-2, "WL-SMCW SMT Mono-Color Chip LED Waterclear super f", Forward Current=60mA, Forward Voltage=2V, Max Operating Temperature=85°C, Max Reverse Voltage (DC)=5V, Min Operating Temperature=-40°C, Dominant Wavelength=590nm, Height=250µm, Length=1.6mm, Luminous Intensity=130mcd, Peak Wavelength=595nm, RoHS=Compliant, Viewing Angle=140°, Width=800µm
D3: library part CMP-2000-07095-2, "TVS DIODE 33V 53.3V DO214AA", Breakdown Voltage=36.7V, Clamping Voltage=53.3V, Manufacturer="Littelfuse Inc", Max Junction Temp=+150°C, Package=SMBJ, Peak Pulse Current=11.3A, Peak Pulse Power=600W, Reverse Standoff Voltage=33V, Temperature="-65°C to +150°C", Temperature Range Low=-65°C, Automotive=No, Category=Diode, ComponentLink2Description=Datasheet, ComponentLink2URL=https://www.littelfuse.com/~/media/electronics/datasheets/tvs_diodes/littelfuse_tvs_diode_smbj_datasheet.pdf.pdf, Device Class L1="Circuit Protection", Device Class L2="TVS Diodes", Device Class L3=unset, Digikey Description="TVS DIODE 33V 53.3V DO214AA", Direction=Unidirectional, Height=2.61mm, Lead Free=Yes, Manufacturer Part Number=SMBJ33A, Mouser Description="TVS DIODE 33V 53.3V DO214AA", Number of Channels=1, Octopart=https://octopart.com/smbj33a-littelfuse-350829, RoHS=TRUE, Temperature Range High=+150°C
D4: library part CMP-1426-00001-4, "LED Low-Power Uni-Color Red 630nm 2V 2-Pin Chip 0603(1608Metric) T/R", Case Code (Imperial)=0603, Case Code (Metric)=1608, Color=Red, Forward Current=100mA, Forward Voltage=2V, Max Junction Temperature (Tj)=95°C, Max Operating Temperature=85°C, Max Reverse Voltage (DC)=5V, Min Operating Temperature=-40°C, Power Dissipation=72mW, Test Current=20mA, Case/Package=0603, Dominant Wavelength=625nm, Height=700µm, Length=1.6mm, Lens Style="Clear, Rectangular", Luminous Intensity=250mcd, Mount="Surface Mount", Packaging="Tape and Reel", Peak Wavelength=630nm, REACH SVHC=Unknown, Reverse Voltage=5V, RoHS=Compliant, Viewing Angle=140°, Wavelength=625nm, Width=800µm
IC1: "Integrated Circuit", Manufacturer_Name=STMicroelectronics, Mouser Part Number=511-STM32G0B1CBT6, Arrow Part Number=STM32G0B1CBT6, Arrow Price/Stock=https://www.arrow.com/en/products/stm32g0b1cbt6/stmicroelectronics?utm_currency=USD&region=nac, Datasheet Link=https://www.st.com/resource/en/datasheet/stm32g0b1cc.pdf, Height=1.6mm, Manufacturer_Part_Number=STM32G0B1CBT6, Mouser Price/Stock=https://www.mouser.co.uk/ProductDetail/STMicroelectronics/STM32G0B1CBT6?qs=CiayqK2gdcKaQJ%2FcS3grXw%3D%3D
IC2: "Integrated Circuit", Manufacturer_Name="Texas Instruments", Mouser Part Number=595-ADS1234IPWR, Arrow Part Number=ADS1234IPWR, Arrow Price/Stock=https://www.arrow.com/en/products/ads1234ipwr/texas-instruments, Datasheet Link=http://www.ti.com/lit/gpn/ADS1234, Height=1.2mm, Manufacturer_Part_Number=ADS1234IPWR, Mouser Price/Stock=https://www.mouser.co.uk/ProductDetail/Texas-Instruments/ADS1234IPWR?qs=RaXRGs7zCv7Rr7lBA3sshA%3D%3D
J1: "Connector", Manufacturer_Name=SAMTEC, Mouser Part Number=200-FTSH10701LDVKTR, Arrow Part Number=FTSH-107-01-L-DV-K-TR, Arrow Price/Stock=https://www.arrow.com/en/products/ftsh-107-01-l-dv-k-tr/samtec?utm_currency=USD&region=nac, Datasheet Link=https://suddendocs.samtec.com/prints/ftsh-1xx-xx-xxx-dv-xxx-xxx-x-xx-mkt.pdf?_gl=1*mdiyn1*_ga*MTcyMTUxMTIwMy4xNzEyMDQxMTc2*_ga_3KFNZC07WW*MTcxMjEzMDIxOS4yLjEuMTcxMjEzMDI1NC4yNS4wLjA., Height=6.25mm, Manufacturer_Part_Number=FTSH-107-01-L-DV-K-TR, Mouser Price/Stock=https://www.mouser.co.uk/ProductDetail/Samtec/FTSH-107-01-L-DV-K-TR?qs=%252BZP6%2F%252BtExtDlh0wyxE013Q%3D%3D
J2 J3 J4 J5 J6 J7 J8 J9: "Connector", Arrow Part Number=S2B-PH-SM4-TB(LF)(SN), Manufacturer_Name="JST (JAPAN SOLDERLESS TERMINALS)", Mouser Part Number=N/A, Arrow Price/Stock=https://www.arrow.com/en/products/s2b-ph-sm4-tb-lf-sn/jst-manufacturing?utm_currency=USD&region=europe, Datasheet Link=https://www.jst-mfg.com/product/pdf/eng/ePH.pdf, Height=6.6mm, Manufacturer_Part_Number=S2B-PH-SM4-TB(LF)(SN), Mouser Price/Stock=https://www.mouser.co.uk/ProductDetail/JST-Commercial/S2B-PH-SM4-TBLFSN?qs=QpmGXVUTftEA9IU90i0xlg%3D%3D
J10 J11: library part CMP-002-00113-1, "Connector Header, PH Series, 3 Position, Side Entry, 2.00mm, Solder, Surface Mount, Natural.", Max Current Rating=2A, Max Operating Temperature=85°C, Min Operating Temperature=-25°C, Voltage Rating=100V, Connector Type="Male Pin", Gender=Male, Mounting Technology="Surface Mount", Pins=3
J12: library part CMP-00257-07672643-1, "43650-0205 Conn Wire to Board HDR 2 POS 3mm Solder RA Side Entry Thru-Hole Micro-Fit 3.0™ Tray", Current Rating=5A, Manufacturer Lifecycle Status=ACTIVE, Voltage Rating=600V, Contact Material=Brass, Contact Plating=Gold, Country of Origin=US, Gender=Male, Glow Wire Compliant=Compliant, Halogen Free="Low Halogen", Housing Material=Thermoplastic, Lifecycle Status=Production, NexarPartId=7672643, Number of Circuits=2, Number Of Contacts=2, Number of Positions=2, Number Of Rows=1, Orientation="Right Angle", Pitch=3mm, Plating=Tin, RoHS=Compliant, Termination="Through Hole"
L1: library part CMP-006-00028-1, "General Purpose Inductor", RoHS Compliant=Yes
R1 R23 R24 R29 R30: library part CMP-03412-005349-1, "RES SMD 10K OHM 1% 1/10W 0603 / RT0603FRE0710KL", Manufacturer=Yageo, Manufacturer Part Number=RT0603FRE0710KL, Package=RT0603, Power Rating=0.1W, Resistance=10KΩ, Temperature="-55°C to +155°C", Temperature Coefficient="50 ppm/°C", Temperature Range High=+155°C, Temperature Range Low=-55°C, Tolerance=0.01, Voltage Rating=75V, Automotive=No, Category=Res, ComponentLink2Description=Datasheet, ComponentLink2URL=http://www.yageo.com/documents/recent/PYu-RT_1-to-0.01_RoHS_L_9.pdf, Composition="Thin Film", Device Class L1="Passive Components", Device Class L2=Resistors, Device Class L3="Chip SMD Resistors", Digikey Description="RES SMD 10K OHM 1% 1/10W 0603", Footprint Url=http://www.yageo.com/exep/pages/download/literatures/PYu-R_Mount_10.pdf, Height=0.55mm, Ipc Land Pattern Name=RESC16080X45, Lead Free=Yes, Mouser Description="Thin Film Resistors - SMD 10K ohm 1% 1/10W", Octopart=https://octopart.com/rt0603fre0710kl-yageo-40009243, RoHS=TRUE, Series=RT
R2 R3 R28: library part CMP-03412-038529-1, "AF0603JR-07220RL Anti-Sulfurated Chip Resistors Automotive Grade 220Ω 5% 100ppm/°C 0603", Case/Package=0603, Max Operating Temperature=155°C, Max Power Dissipation=100mW, Min Operating Temperature=-55°C, Resistance=220R, Resistor Type="Thick Film", Temperature Coefficient=100ppm/°C, Tolerance=5%, Features="Moisture Resistant", Height=0.022inch, Lead Free="Lead Free", Length=0.063inch, Number of Terminations=2, Packaging="Tape and Reel", RoHS Compliant=Yes, Series=AF, Width=0.031inch
R4: library part CMP-03412-030646-1, "RT0603 100Ω 0.1W 50 ppm/°C 1.00% RT0603FRE07100RL", Manufacturer=Yageo, Manufacturer Part Number=RT0603FRE10100RL, Package=RT0603, Power Rating=0.1W, Resistance=100Ω, Temperature="-55°C to +155°C", Temperature Coefficient="50 ppm/°C", Temperature Range High=+155°C, Temperature Range Low=-55°C, Tolerance=0.01, Voltage Rating=75V, Automotive=No, Category=Res, ComponentLink2Description=Datasheet, ComponentLink2URL=http://www.yageo.com/documents/recent/PYu-RT_1-to-0.01_RoHS_L_9.pdf, Composition="Thin Film", Device Class L1="Passive Components", Device Class L2=Resistors, Device Class L3="Chip SMD Resistors", Footprint Url=http://www.yageo.com/exep/pages/download/literatures/PYu-R_Mount_10.pdf, Height=0.55mm, Ipc Land Pattern Name=RESC16080X45, Lead Free=Yes, Octopart=https://octopart.com/rt0603fre10100rl-yageo-22252409, RoHS=TRUE, Series=RT
R5 R6 R7 R8 R9 R10 R21 R22: library part CMP-2001-00588-1, Manufacturer=Panasonic, Part Number=ERA6AEB121V
R11 R12 R13 R14 R15 R16 R17 R18 R19 R20: library part CMP-2000-00870-2, "RES SMD 100 OHM 0.1% 1/10W 0603", Case Code (Imperial)=0603, Case Code (Metric)=1608, Max Operating Temperature=155°C, Max Power Dissipation=100mW, Min Operating Temperature=-55°C, Package Quantity=5000, Resistance=100R, Resistance Tolerance=0.1%, Resistor Type="Thin Film", Temperature Coefficient=25ppm/°C, Voltage Rating=75V, Case/Package=0603, Construction=Rectangular, Contact Plating=Tin, Depth=0.8mm, Height=0.45mm, Length=1.6mm, Military Standard=Not, Mount="Surface Mount", Number of Pins=2, Number of Terminations=2, Packaging="Tape and Reel", Power Rating=100mW, Radiation Hardening=No, REACH SVHC="No SVHC", RoHS Compliant=Yes, Series=ERA-3A, Size Code=0603, Technology="METAL FILM", Termination=SMD/SMT, Tolerance=0.1%, Width=0.8mm
R25: library part CMP-03412-039700-1, "Anti-Sulfurated Chip Resistors Automotive Grade 120Ω 1% 100ppm/°C 0603 AF0603FR-07120RL", Case/Package=0603, Max Operating Temperature=155°C, Max Power Dissipation=100mW, Min Operating Temperature=-55°C, Resistance=120R, Resistor Type="Thick Film", Temperature Coefficient=100ppm/°C, Tolerance=1%, Features="Moisture Resistant", Height=0.022inch, Length=0.063inch, Number of Terminations=2, Packaging="Tape and Reel", RoHS Compliant=Yes, Series=AF, Width=0.031inch
R26: library part CMP-009-00192-1, "Fixed Resistor, Metal Glaze/thick Film, 0.25W, 100000ohm, 200V, 1% +/-Tol, 100ppm/Cel, Surface Mount, 1206", Resistor Type="FIXED RESISTOR", Pins=2, Reach SVHC Compliant=Yes, RoHS Compliant=Yes
R27: library part CMP-009-00195-1, "Fixed Resistor, Thin Film, 0.125W, 18700ohm, 100V, 0.1% +/-Tol, 25ppm/Cel, Surface Mount, 0805", Case/Package=0805, Max Operating Temperature=155°C, Min Operating Temperature=-55°C, Package Height=0.5mm, Package Length=2mm, Package Width=1.25mm, Power=125mW, Rated Temperature=85°C, Resistor Type="FIXED RESISTOR", Temperature Coefficient (ppm/Cel)=25, Tolerance=0.1%, Working Voltage=100V, Construction=Rectangular, JESD-609 Code=e3, Mounting Technology="Surface Mount", Packaging="Tape and Reel", Pins=2, Reach SVHC Compliant=Yes, Reference Standard=AEC-Q200, RoHS Compliant=Yes, Technology="THIN FILM", Terminal Finish=Nickel, Termination=Wraparound
U1: "Integrated Circuit", Manufacturer_Name="Texas Instruments", Mouser Part Number=595-TCAN3414DR, Arrow Part Number=TCAN3414DR, Arrow Price/Stock=https://www.arrow.com/en/products/tcan3414dr/texas-instruments?region=nac, Datasheet Link=https://www.ti.com/lit/ds/symlink/tcan3414.pdf?ts=1713723144569&ref_url=https%253A%252F%252Fwww.mouser.ch%252F, Height=1.75mm, Manufacturer_Part_Number=TCAN3414DR, Mouser Price/Stock=https://www.mouser.co.uk/ProductDetail/Texas-Instruments/TCAN3414DR?qs=mELouGlnn3egF2AojRJddw%3D%3D
U2: library part CMP-019-00059-1, "SIMPLE SWITCHER® 4.5-V to 65-V, 1-A synchronous buck converter with 25-µA IQ 6-SOT-23 -40 to 150", Case/Package=SOT-23, Frequency=400Hz, Max Supply Voltage=65V, Min Supply Voltage=4.5V, Output Current=1A, Pins=6
U3: library part CMP-12153-000011-1, "IC REG LINEAR 3.3V 2A 6DFN", Case/Package=DFN, Dropout Voltage=130mV, Max Input Voltage=6V, Max Operating Temperature=125°C, Min Input Voltage=1.25V, Min Operating Temperature=-40°C, Operating Supply Current=1mA, Output Current=2A, Output Voltage=3.3V, Package Quantity=3000, Lead Free="Lead Free", Mount="Surface Mount", Number Of Outputs=1, Number of Regulators=1, Output Type=Fixed, Packaging="Tape and Reel"
U4: library part CMP-00370-103943066-1, "TMP461AIRUNR-S Temperature Sensor Digital, Local/Remote -40°C ~ 125°C 11 b 10-WQFN (2x2)", Manufacturer Lifecycle Status=ACTIVE, Height=0m, Length=2mm, Lifecycle Status=Production, NexarPartId=103943066, Number of Pins=10, Schedule B="8542390000, 8542390000", Thickness=750µm, Width=2mm
Y1: library part CMP-27762-007472-1, "Crystal 50MHz ±10ppm 4pF SMD-4 2.5mm x 2mm", Case/Package=SMD/SMT, ESR (Equivalent Series Resistance)=70R, Frequency=50MHz, Frequency Stability=10ppm, Load Capacitance=4pF, Max Operating Temperature=70°C, Min Operating Temperature=-20°C, Frequency Tolerance=10ppm, Mount="Surface Mount", Packaging="Tape and Reel", RoHS Compliant=Yes

## Free pads (board coordinates)
  round 5.08 hole 3.2: 2(5,5) 2(5,60) 2(60,5) 2(60,60)

## Via types
v1: diameter 0.61, hole 0.305, Top Layer 1 to Bottom Layer 1, tented both sides, 250 vias

## Nets (pads, with @x,y where several pads share a name; then routed paths per layer and width w, separated by ;. In a path a pad name is that pad's centre, name@x,y a point inside that pad or via, vN(x,y) a via of type N, cw(c..) or ccw(c..) an arc to the next point about the centre after c; other vN are vias at no path point)
3V3: C3.1 C4.1 C5.1 C6.1 C8.1 C9.1 C16.1 C24.1 C25.1 D4.2 IC1.4 IC1.5 IC1.6 IC2.1 IC2.22 J1.3 J2.1 J4.1 J6.1 J8.1 R5.2 R7.2 R9.2 R20.1 R21.2 R29.1 R30.2 U1.3 U3.1 U3.2 U4.1 | length 38.7
  Top Layer 1 w0.25: J4.1 17,52.234 R7.2 ; J8.1@28,54.996 J8.1@28.004,54.996
  Top Layer 1 w0.254: U3.2 U3.2@11.1,15.562 ; v1(17.792,39.19) 19.204,39.19 R20.1 ; v1(34.977,33.5) 34.977,35.177 35.075,35.275 IC2.1 ; J6.1 39,55.373 J6.1@39.373,55 ; J2.1 50,55.373 J2.1@50.373,55
  Top Layer 1 w0.45: C8.1@26.427,38.227 26.427,38.254 26.581,38.408 26.592,38.408 27.359,39.175 v1(27.875,39.175) IC2.22
  Top Layer 1 w0.5: v1(35.817,53.485) 37.844,53.485 R9.2@39.328,52
  Top Layer 1 w0.508: J8.1 28,52.303 R21.2
  Top Layer 1 w0.635: v1(38.933,24.365) 40.242,24.365 C16.1 40.258,24.365 U1.3
  Top Layer 1 w0.75: v1(8.3,35.04) J1.3 ; v1(29.65,18.62) D4.2 ; R9.2@39.328,52 R9.2
  Top Layer 1 w1: R7.2@17.234,52 v1(19,52) ; R21.2 v1(30.25,52.004) ; J6.1@39.373,55 v1(40.5,55) ; v1(46,52) R5.2 ; J2.1@50.373,55 v1(51.5,55)
  other v1: 14.307,16.5 40.559,17.25 12.658,18 14.307,18 18.183,26.344 48.276,35.933
5V0: C20.1 C21.1 C22.1 C23.1 L1.2 R26.1 U3.5 U3.6 | length 22.8
  Top Layer 1 w0.152: C20.1 C20.1@11.876,4.626 ; C22.1 C22.1@12.05,11.299 ; U3.6@11.982,12.879 U3.6
  Top Layer 1 w0.254: C20.1@12.05,4.5 12.05,1.899 12.199,1.75 30.573,1.75 30.722,1.899 30.722,1.948 30.911,2.137 31.138,2.137 R26.1
AINN1: C11.2 IC2.12 R12.2 | length 15.7
  Top Layer 1 w0.4: IC2.12@36,42.425 46.421,42.425 48.177,44.181 48.177,45.269 47.8,45.646 R12.2
AINN2: C14.1 IC2.17 R17.2 | length 15.6
  Top Layer 1 w0.4: R17.2 17.303,45.103 17,44.8 17.431,44.369 17.431,44.319 18.25,43.5 24.218,43.5 25.293,42.425 IC2.17
AINN3: C12.2 IC2.14 R14.2 | length 4.5
  Top Layer 1 w0.4: IC2.14 36.572,43.725 37.397,44.55 37.397,44.6 37.397,44.65 36.903,45.144 R14.2
AINN4: C13.1 IC2.15 R15.2 | length 4.6
  Top Layer 1 w0.45: C13.1 28.937,44.35 IC2.15 ; C13.1@27.601,44.452 27.774,44.625 27.774,46.123 28.202,46.551 R15.2
AINP1: C11.1 IC2.11 R11.2 | length 18.1
  Top Layer 1 w0.4: IC2.11 47.358,41.775 49.764,44.181 49.764,45.147 50.123,45.506 50.123,46.697 R11.2
AINP2: C14.2 IC2.18 R18.2 | length 17.9
  Top Layer 1 w0.4: R18.2 15.05,45.25 15.5,44.8 C14.2@15.5,44.621 ; C14.2@15.423,44.8 15.777,44.446 15.777,43.895 16.922,42.75 23.756,42.75 24.731,41.775 IC2.18
AINP3: C12.1 IC2.13 R13.2 | length 6.6
  Top Layer 1 w0.4: IC2.13 38.075,43.075 38.897,43.897 C12.1@38.897,44.6 ; C12.1@38.897,44.65 39.403,45.156 R13.2
AINP4: C13.2 IC2.16 R16.2 | length 6.7
  Top Layer 1 w0.4: R16.2 25.871,44.426 26.301,43.996 26.301,43.489 26.715,43.075 IC2.16
CANH: J10.2 J11.2 R25.2 U1.7 | length 27.1
  Top Layer 1 w0.254: U1.7 47.977,25.65 53.148,25.65 R25.2 ; R25.2@53.18,25.671 53.388,25.879 53.48,25.879 54.521,26.92 54.521,30.994 55.127,31.601 55.127,31.627 J10.2@55.5,32 ; J10.2 55.504,32 55.131,32.373 55.131,32.662 54.341,33.452 54.341,42.037 54.917,42.613 55.113,42.613 55.5,43 J11.2
CANL: J10.3 J11.3 R25.1 U1.6 | length 27.4
  Top Layer 1 w0.254: U1.6@47.962,24.344 47.983,24.323 R25.1@53.154,24.323 ; R25.1 53.251,24.323 55.332,26.404 55.332,29.627 55.705,30 J10.3 57.123,30.373 58.434,30.373 59,30.939 59,39.979 58.732,40.247 58.373,40.606 58.373,40.627 58,41 J11.3
CB: C17.2 U2.1 | length 2.3
  Top Layer 1 w0.25: C17.2 32.325,9.2 U2.1
FB: R26.2 R27.1 U2.3 | length 7.1
  Top Layer 1 w0.25: R26.2@31.751,5.25 33.25,5.25 ; 33.25,7.251 33.25,5.25 ; R27.1 33.25,5.25
  Top Layer 1 w0.254: 33.25,7.251 33.299,7.3 U2.3
  Top Layer 1 w0.4: R26.2 R26.2@31.751,5.25
GND: C1.2 C2.2 C3.2 C4.2 C5.2 C6.2 C7.2 C8.2 C9.2 C16.2 C18.2 C19.2 C20.2 C21.2 C22.2 C23.2 C24.2 C25.2 D3.2 IC1.7 IC2.2 IC2.3 IC2.5 IC2.6 IC2.21 IC2.25 J1.5 J1.7 J2.MP1 J2.MP2 J3.2 J3.MP1 J3.MP2 J4.MP1 J4.MP2 J5.2 J5.MP1 J5.MP2 J6.MP1 J6.MP2 J7.2 J7.MP1 J7.MP2 J8.MP1 J8.MP2 J9.2 J9.MP1 J9.MP2 J10.1 J10.4 J10.5 J11.1 J11.4 J11.5 J12.2 J12.3 J12.4 R1.2 R2.1 R3.1 R4.1 R6.1 R8.1 R10.1 R19.1 R22.1 R23.2 R24.2 R27.2 R28.1 U1.2 U2.2 U3.3 U3.7 U4.5 U4.6 U4.10 Y1.2 Y1.4 | length 6
  Top Layer 1 w0.152: Y1.2 24.848,23.286 24.848,23.536 25.261,23.949 25.699,24.388 Y1.4
  Top Layer 1 w0.254: U3.3 U3.3@10.15,15.562 ; U1.2@42.534,25.631 U1.2 ; U4.6 U4.6@45.5,33.121
  Top Layer 1 w0.635: C16.2@40.161,25.689 40.188,25.689 C16.2 40.254,25.631 U1.2@42.534,25.631
  Bottom Layer 1 w0.254: J7.2 J7.2@39,57.5
  other v1: 8.5,3.5 29.5,3.5 38.5,3.5 41.5,3.5 44.5,3.5 47.5,3.5 50.5,3.5 53.5,3.5 56.5,3.5 28,6.5 46,6.5 49,6.5 52,6.5 55,6.5 64,6.5 5.5,9.5 8.5,9.5 29.5,9.5 35.5,9.5 44.5,9.5 47.5,9.5 50.5,9.5 53.5,9.5 62.5,9.5 7,12.5 28,12.5 31,12.5 34,12.5 37,12.5 64,12.5 5.5,15.5 8.5,15.5 17.5,15.5 20.5,15.5 23.5,15.5 26.5,15.5 29.5,15.5 35.5,15.5 38.5,15.5 41.5,15.5 44.5,15.5 59.5,15.5 62.5,15.5 7,18.5 10,18.5 16,18.5 19,18.5 22,18.5 28,18.5 37,18.5 43,18.5 46,18.5 64,18.5 5.5,21.5 8.5,21.5 11.5,21.5 14.5,21.5 20.5,21.5 22.533,21.493 38.5,21.5 44.5,21.5 47.5,21.5 50.5,21.5 53.5,21.5 56.5,21.5 59.5,21.5 62.5,21.5 7,24.5 10,24.5 13,24.5 16,24.5 34,24.5 46,24.5 55,24.5 58,24.5 61,24.5 64,24.5 5.5,27.5 11.5,27.5 32.5,27.5 53.5,27.5 56.5,27.5 59.5,27.5 13,30.5 19,30.5 22,30.5 25,30.5 43,30.5 49,30.5 52,30.5 61,30.5 64,30.5 5.5,33.5 8.5,33.5 32.5,33.5 33.723,33.5 38.5,33.5 41.5,33.5 44.5,33.5 50.5,33.5 53.5,33.5 62.5,33.5 7,36.5 13,36.5 19,36.5 22,36.5 25,36.5 31,36.5 34,36.5 40,36.5 43,36.5 46,36.5 52,36.5 58,36.5 5.5,39.5 8.5,39.5 11.5,39.5 14.5,39.5 26.5,39.5 32.5,39.5 44.5,39.5 47.5,39.5 50.5,39.5 53.5,39.5 56.5,39.5 7,42.5 10,42.5 13,42.5 16,42.5 31,42.5 34,42.5 52,42.5 61,42.5 64,42.5 5.5,45.5 8.5,45.5 11.5,45.5 20.5,45.5 23.5,45.5 29.5,45.5 32.5,45.5 35.5,45.5 41.5,45.5 44.5,45.5 53.5,45.5 59.5,45.5 62.5,45.5 7,48.5 10,48.5 19,48.5 22,48.5 31,48.5 34,48.5 43,48.5 46,48.5 49,48.5 52,48.5 55,48.5 58,48.5 5.5,51.5 8.5,51.5 11.5,51.5 20.5,51.5 32.5,51.5 35.5,51.5 41.5,51.5 44.5,51.5 53.5,51.5 56.5,51.5 59.5,51.5 62.5,51.5 7,54.5 10,54.5 19,54.5 22,54.5 31,54.5 34,54.5 43,54.5 55,54.5 58,54.5 61,54.5 64,54.5 8.5,57.5 11.5,57.5 20.5,57.5 23.5,57.5 29.5,57.5 32.5,57.5 35.5,57.5 41.5,57.5 44.5,57.5 53.5,57.5 56.5,57.5 62.5,57.5 10,60.5 16,60.5 22,60.5 25,60.5 28,60.5 37,60.5 40,60.5 43,60.5 49,60.5 55,60.5 64,60.5 5.5,63.5 8.5,63.5 14.5,63.5 17.5,63.5 26.5,63.5 32.5,63.5 38.5,63.5 47.5,63.5 50.5,63.5 56.5,63.5 59.5,63.5
LEDG: D1.2 IC1.19 | length 2.2
  Top Layer 1 w0.152: D1.2@32.75,18.895 IC1.19
  Top Layer 1 w0.254: D1.2 32.5,18.645 D1.2@32.75,18.895
LEDY: D2.2 IC1.20 | length 2.3
  Top Layer 1 w0.152: IC1.20 33.25,19.12 D2.2
N1: R5.1 R6.2 R12.1 | length 4.3
  Top Layer 1 w0.254: R12.1 R5.1 R6.2
N2: R7.1 R8.2 R17.1 | length 4.8
  Top Layer 1 w0.25: R8.2 15.213,50.55 16.784,50.55 17.303,50.031 R17.1
N3: R9.1 R10.2 R14.1 | length 4.6
  Top Layer 1 w0.254: R14.1 36.903,50.003 R10.2 R9.1
N4: R15.1 R21.1 R22.2 | length 4.7
  Top Layer 1 w0.25: R22.2@25.87,50.104 28.059,50.104 R21.1 ; R15.1@27.8,47.976 28.009,48.185 28.009,50.134 R21.1@28.059,50.184
NetC10_1: C10.1 IC2.10 | length 5.5
  Top Layer 1 w0.4: IC2.10 39.81,41.125 40.378,40.557 C10.1@40.753,40.557
NetC10_2: C10.2 IC2.9 | length 6.4
  Top Layer 1 w0.4: IC2.9 37.732,40.475 40.07,38.137 40.07,38.105 40.38,37.795 C10.2
NetD1_1: D1.1 R2.2 | length 1.7
  Top Layer 1 w0.254: R2.2 D1.1
NetD2_1: D2.1 R3.2 | length 2
  Top Layer 1 w0.254: D2.1 34.5,16.27 R3.2
NetD4_1: D4.1 R28.2 | length 2
  Top Layer 1 w0.254: R28.2 30.5,16.27 D4.1
NetIC1_33: IC1.33 U1.4 | length 8.4
  Top Layer 1 w0.152: IC1.33 37.75,26.25 38.05,25.95 38.05,23.75 38.55,23.25 42.383,23.25 U1.4
NetIC1_34: IC1.34 U1.1 | length 5.6
  Top Layer 1 w0.152: IC1.34@37,26.75 42.383,26.75 U1.1
NetJ1_11: J1.11 R4.2 | length 3.3
  Top Layer 1 w0.254: R4.2 7.86,29.96 J1.11
NetR23_1: R23.1 U1.8 | length 2.4
  Top Layer 1 w0.254: U1.8 50.228,26.905 R23.1
NetR24_1: R24.1 U1.5 | length 2.4
  Top Layer 1 w0.254: U1.5 50.228,23.095 R24.1
NetU4_2: U4.2 U4.3 | length 0.5
  Top Layer 1 w0.254: U4.3 U4.2
NRST: C7.1 IC1.10 J1.12 | length 24.3
  Top Layer 1 w0.152: IC1.10 29.437,23.25 v1(30.75,24.563)
  Top Layer 1 w0.254: J1.12 15.227,29.768 16.638,29.768 17,29.406 17,25.479 17.829,24.65 20.325,24.65 C7.1
  Bottom Layer 1 w0.254: v1(20.325,24.674) 21.375,24.674 22.5,25.8 29.513,25.8 v1(30.75,24.563)
P1: J2.2 J3.1 R11.1 | length 16.8
  Top Layer 1 w0.254: v1(46.559,55) 47.627,55 48,55.373 J2.2 48,55 49.232,53.768 51.432,53.768 51.75,53.45 51.75,49.253 50.935,48.438 50.413,48.438 R11.1
  Bottom Layer 1 w0.254: v1(46.559,55) 47.627,55 48,55.373 J3.1
P2: J4.2 J5.1 R18.1 | length 13.9
  Top Layer 1 w0.25: J4.2 15,55.125 14.625,54.75 v1(13.75,54.75) 12.5,53.5 12.5,49.629 14.027,48.101 R18.1
  Bottom Layer 1 w0.254: v1(13.75,54.75) 14.627,54.75 15,55.123 J5.1
P3: J6.2 J7.1 R13.1 | length 15.4
  Top Layer 1 w0.254: v1(35.5,55.111) 36.627,55.111 J6.2@37,55.484 ; J6.2 J6.2@37,55.484 ; R13.1 39.403,48 40.703,49.3 40.703,52.935 39.638,54 38.088,54 37.461,54.627 37.373,54.627 37,55 J6.2@37,55.484
  Bottom Layer 1 w0.254: v1(35.5,55.111) 36.627,55.111 37,55.484 J7.1
P4: J8.2 J9.1 R16.1 | length 14.3
  Top Layer 1 w0.25: J8.2 26,55 25.01,54.01 24.842,54.01 v1(24.774,53.941) 24.049,53.941 23.896,53.788 23.896,48.75 24.671,47.976 R16.1@26.1,47.976
  Bottom Layer 1 w0.254: v1(24.774,53.941) 24.842,54.009 25.009,54.009 26,55 J9.1
REFN: C15.1 IC2.19 R19.2 | length 8.9
  Top Layer 1 w0.4: R19.2 22.929,41.121 C15.1 23.076,41.125 IC2.19
REFP: C15.2 IC2.20 R20.2 | length 9.4
  Top Layer 1 w0.4: R20.2 21.011,39.395 C15.2 23.354,39.749 23.82,39.749 24.546,40.475 IC2.20
SCL: IC1.25 R29.2 U4.9 | length 20.4
  Top Layer 1 w0.254: IC1.25 39,22.25 v1(40,21.25) 39.5,20.75 R29.2 ; U4.9 47,32 v1(47.5,31.5)
  Bottom Layer 1 w0.254: v1(40,21.25) 47.5,28.75 v1(47.5,31.5)
SDA: IC1.26 R30.1 U4.8 | length 20
  Top Layer 1 w0.254: IC1.26 39.5,22.75 v1(40,22.25) 41.5,20.75 R30.1 ; v1(46.5,31) U4.8
  Bottom Layer 1 w0.254: v1(40,22.25) 46.5,28.75 v1(46.5,31)
SG_A0: IC1.42 IC2.8 | length 14.8
  Top Layer 1 w0.254: IC1.42 32.75,30.5 33.592,31.342 35.391,31.342 37.25,33.2 37.25,39 36.425,39.825 IC2.8
SG_A1: IC1.43 IC2.7 | length 13.9
  Top Layer 1 w0.254: IC1.43 32.25,30.695 33.555,32 35.358,32 36.75,33.392 36.75,38.75 36.325,39.175 IC2.7
SG_DRDY/DOUT: IC1.44 IC2.28 | length 6.9
  Top Layer 1 w0.254: IC2.28 29.562,34.188 31.75,32 IC1.44
SG_GAIN0: IC1.48 IC2.23 | length 12.2
  Top Layer 1 w0.254: IC2.23 28.525,38.525 26.906,36.906 26.906,34.039 29.75,31.195 IC1.48
SG_GAIN1: IC1.47 IC2.24 | length 11.3
  Top Layer 1 w0.254: IC2.24 28.625,37.875 27.35,36.6 27.35,34.242 30.25,31.342 IC1.47
SG_PWDN: IC1.46 IC2.26 | length 9.8
  Top Layer 1 w0.254: IC2.26 28.575,36.575 27.9,35.9 27.9,34.338 30.75,31.488 IC1.46
SG_SCLK: IC1.45 IC2.27 | length 8.9
  Top Layer 1 w0.254: IC2.27@29.558,35.929 28.677,35.929 28.41,35.662 28.41,34.59 31.25,31.75 IC1.45
SW: C17.1 L1.1 U2.6 | length 13.5
  Top Layer 1 w0.25: L1.1 25.95,9.65 27.275,10.975 C17.1 35.725,10.975 36.825,9.875 U2.6
SWCLK: IC1.36 J1.6 R1.1 | length 35.2
  Top Layer 1 w0.152: IC1.36 38.05,27.75 R1.1@38.723,28.423
  Top Layer 1 w0.254: J1.6 18.127,33.77 18.254,33.77 18.254,34.265 19.016,34.265 19.016,33.218 19.778,33.218 19.778,34.265 20.54,34.265 20.54,33.218 21.302,33.218 21.302,34.265 22.064,34.265 22.064,33.218 22.826,33.218 22.826,33.77 23.634,33.77 24.33,33.77 v1(26.35,31.75) ; v1(38.294,30.225) 38.294,30.129 38.723,29.699 R1.1
  Bottom Layer 1 w0.254: v1(26.35,31.75) 27.35,30.75 27.9,30.75 37.769,30.75 v1(38.294,30.225)
SWDIO: IC1.35 J1.4 | length 35.5
  Top Layer 1 w0.152: IC1.35 40.75,27.25 v1(42,28.5)
  Top Layer 1 w0.254: J1.4 24.46,35.04 v1(26,33.5)